# Altium PCB FPGA_DB.PcbDoc (part 1 of 5)
Units mil, origin at the board's own origin, x right, y up, seen from the top; angles counter-clockwise.
Board outline 5980 x 6510 mil, 4 copper layers (Top, Ground Plane, Power Plane, Bottom), stack 61.497 mil thick; 140 components, 246 nets, 1021 pads, 2685 vias.
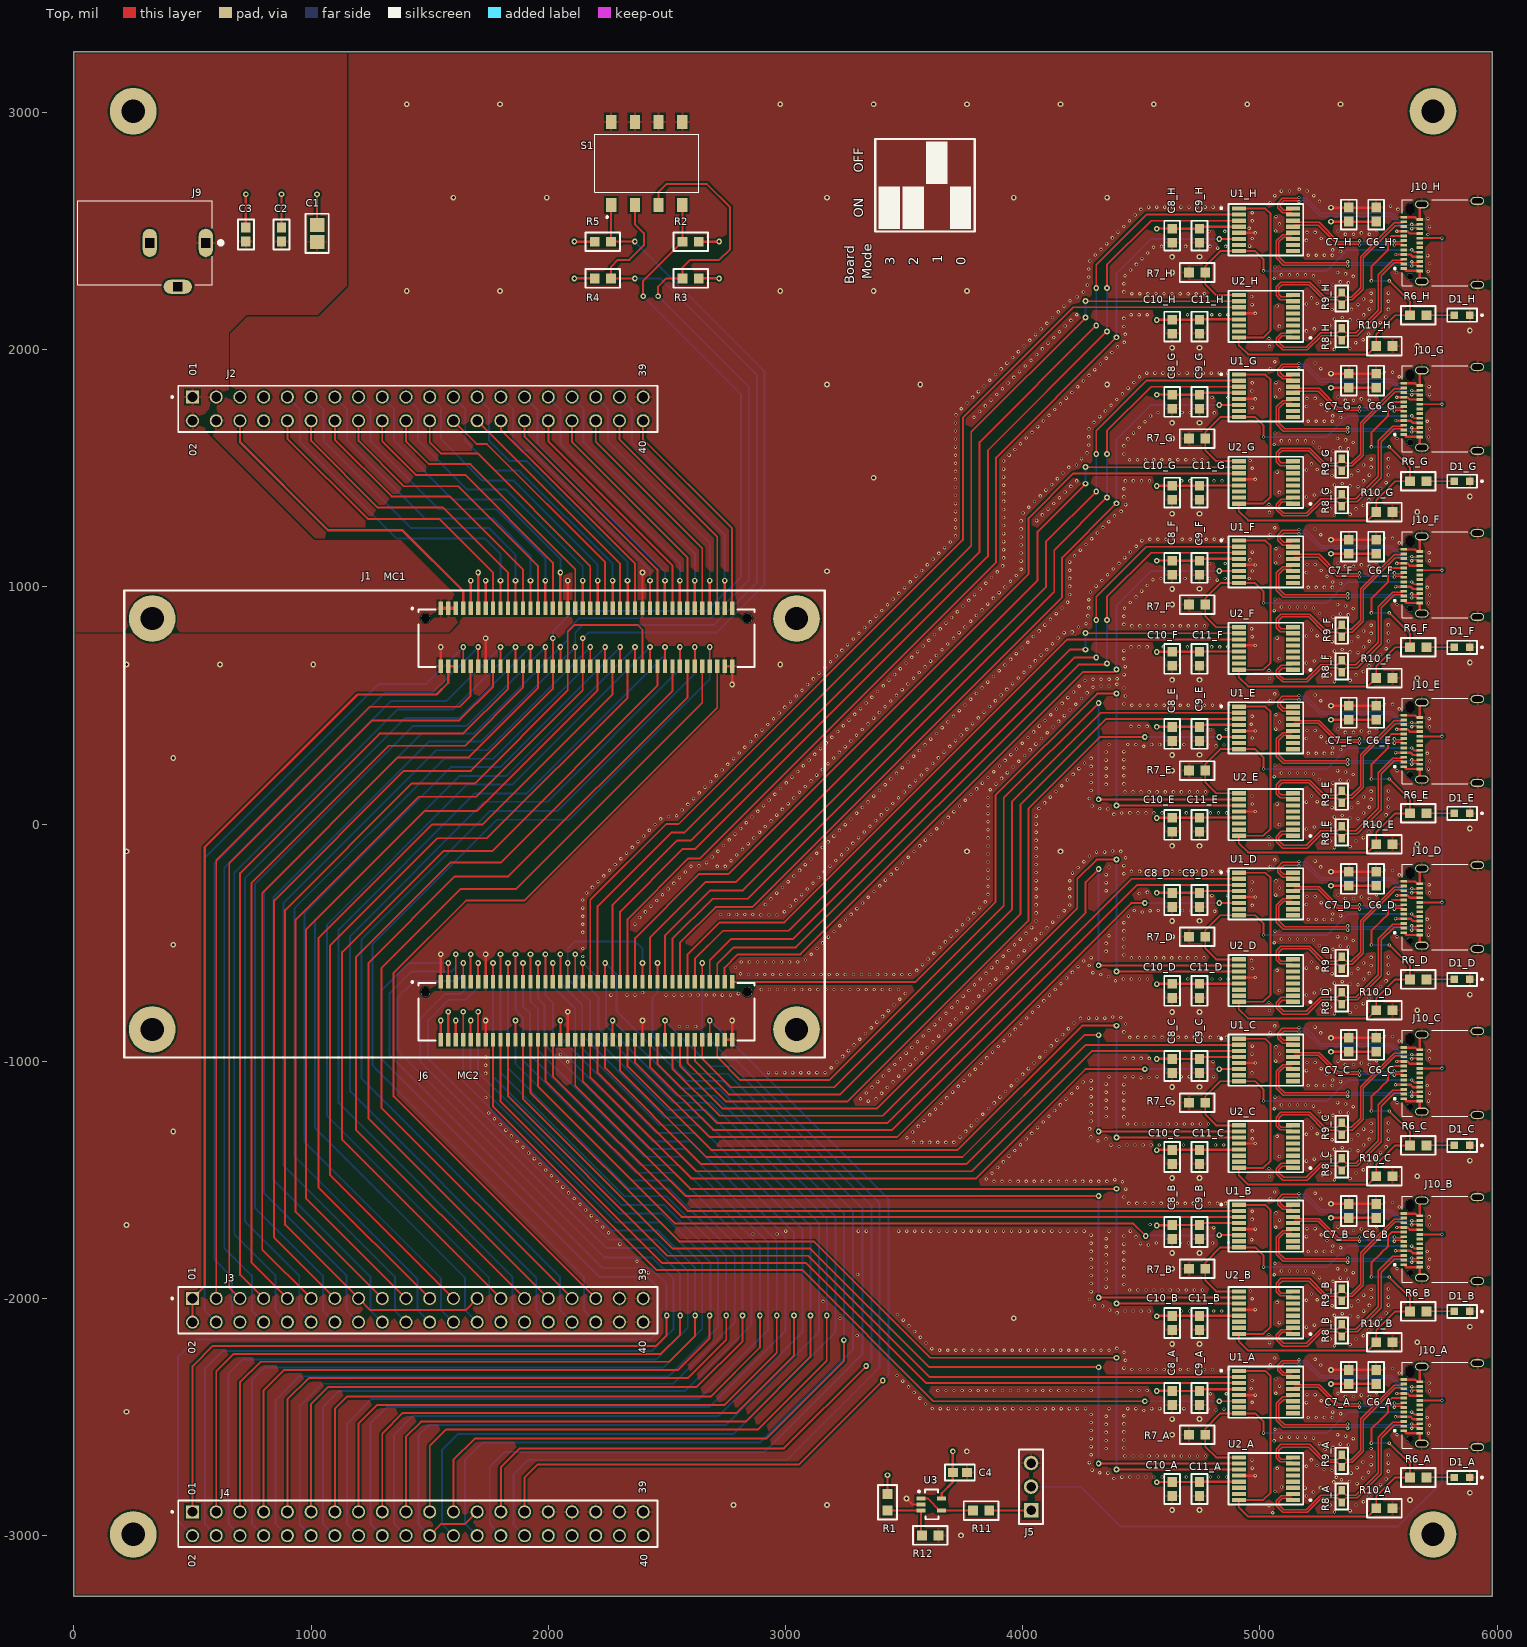
[diagram p0: Top view]
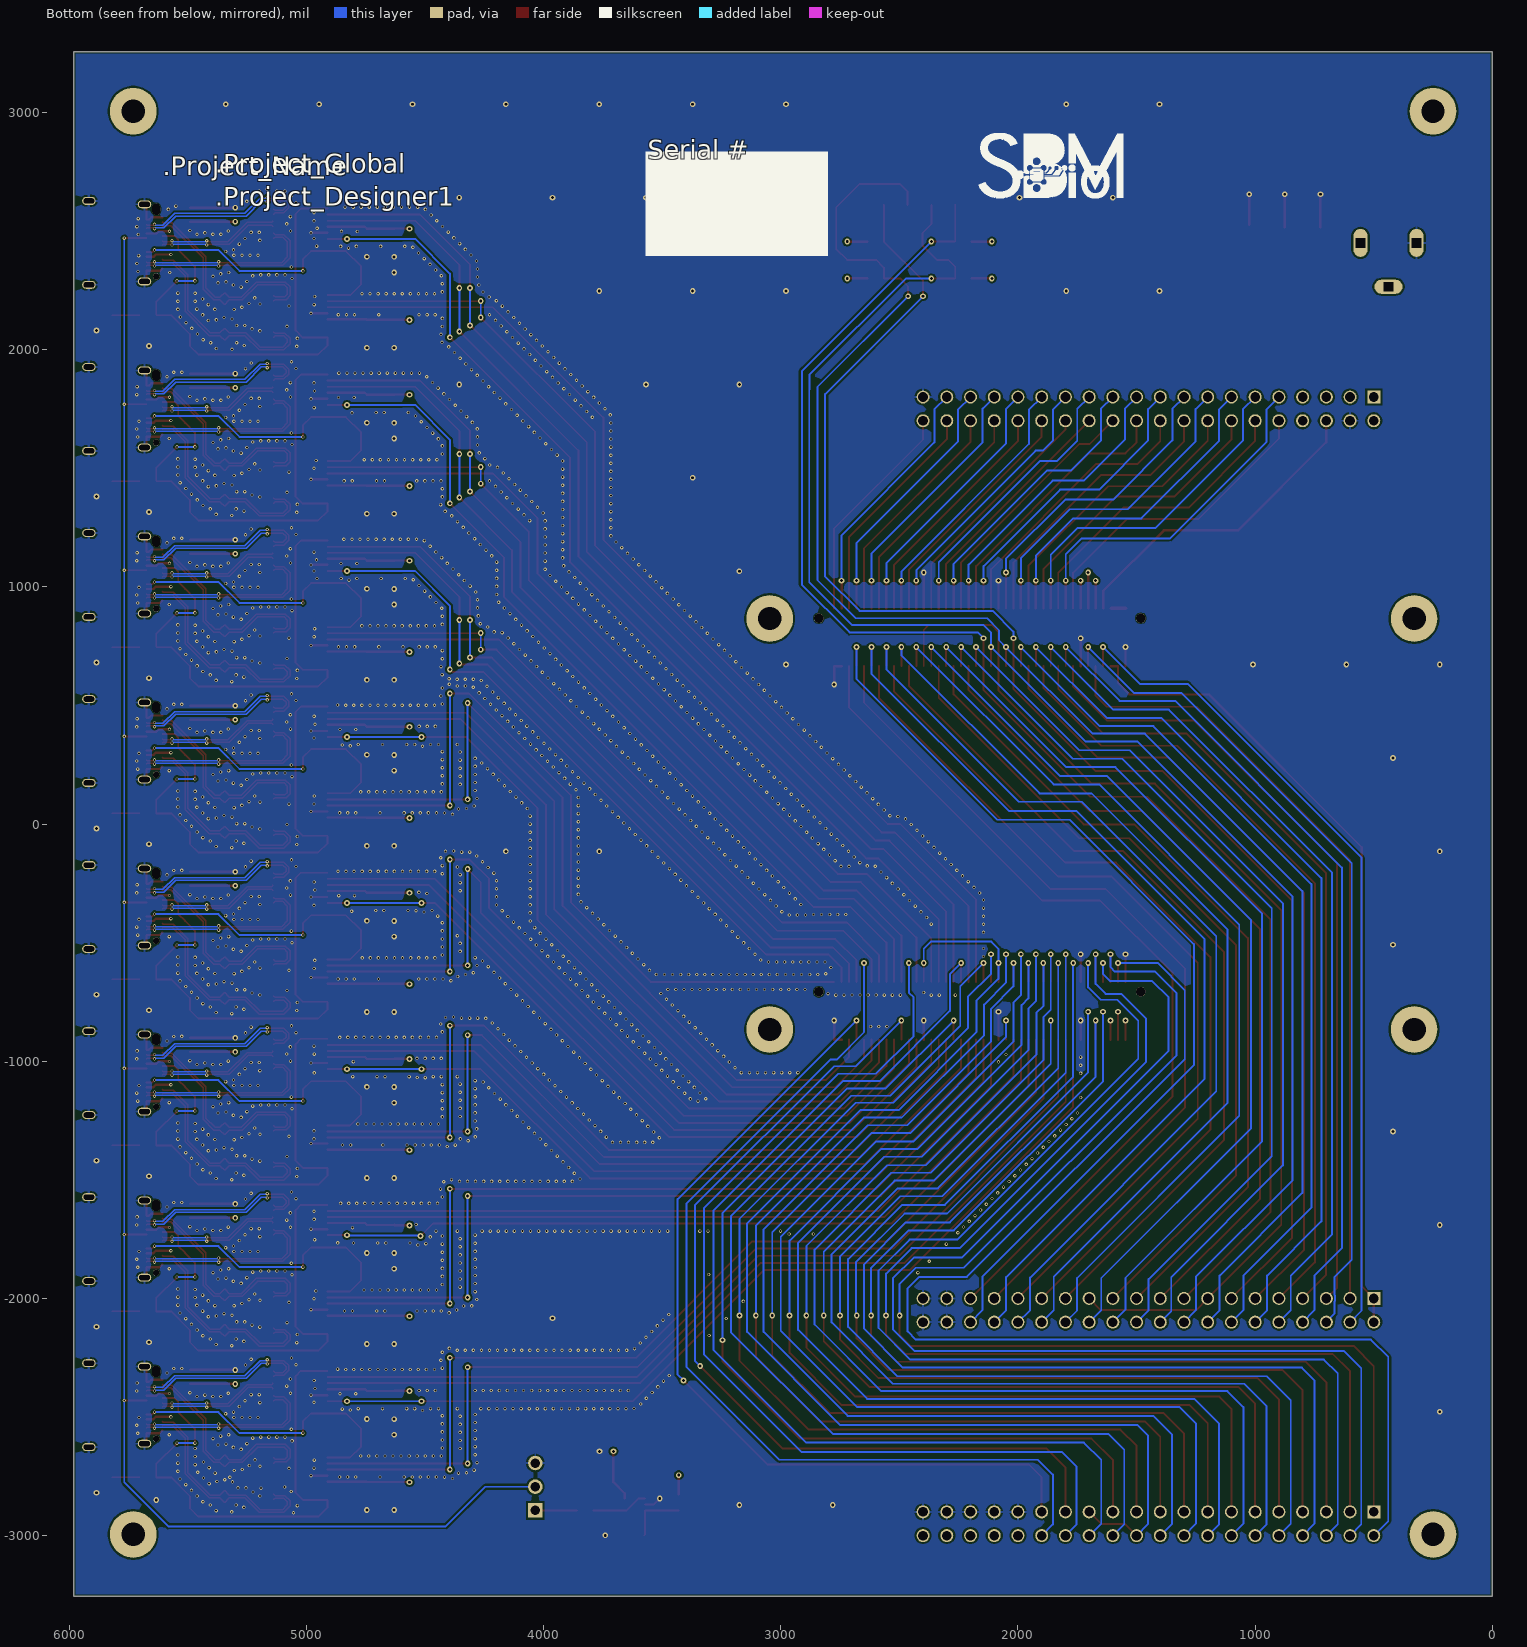
[diagram p1: Bottom view, seen from below]
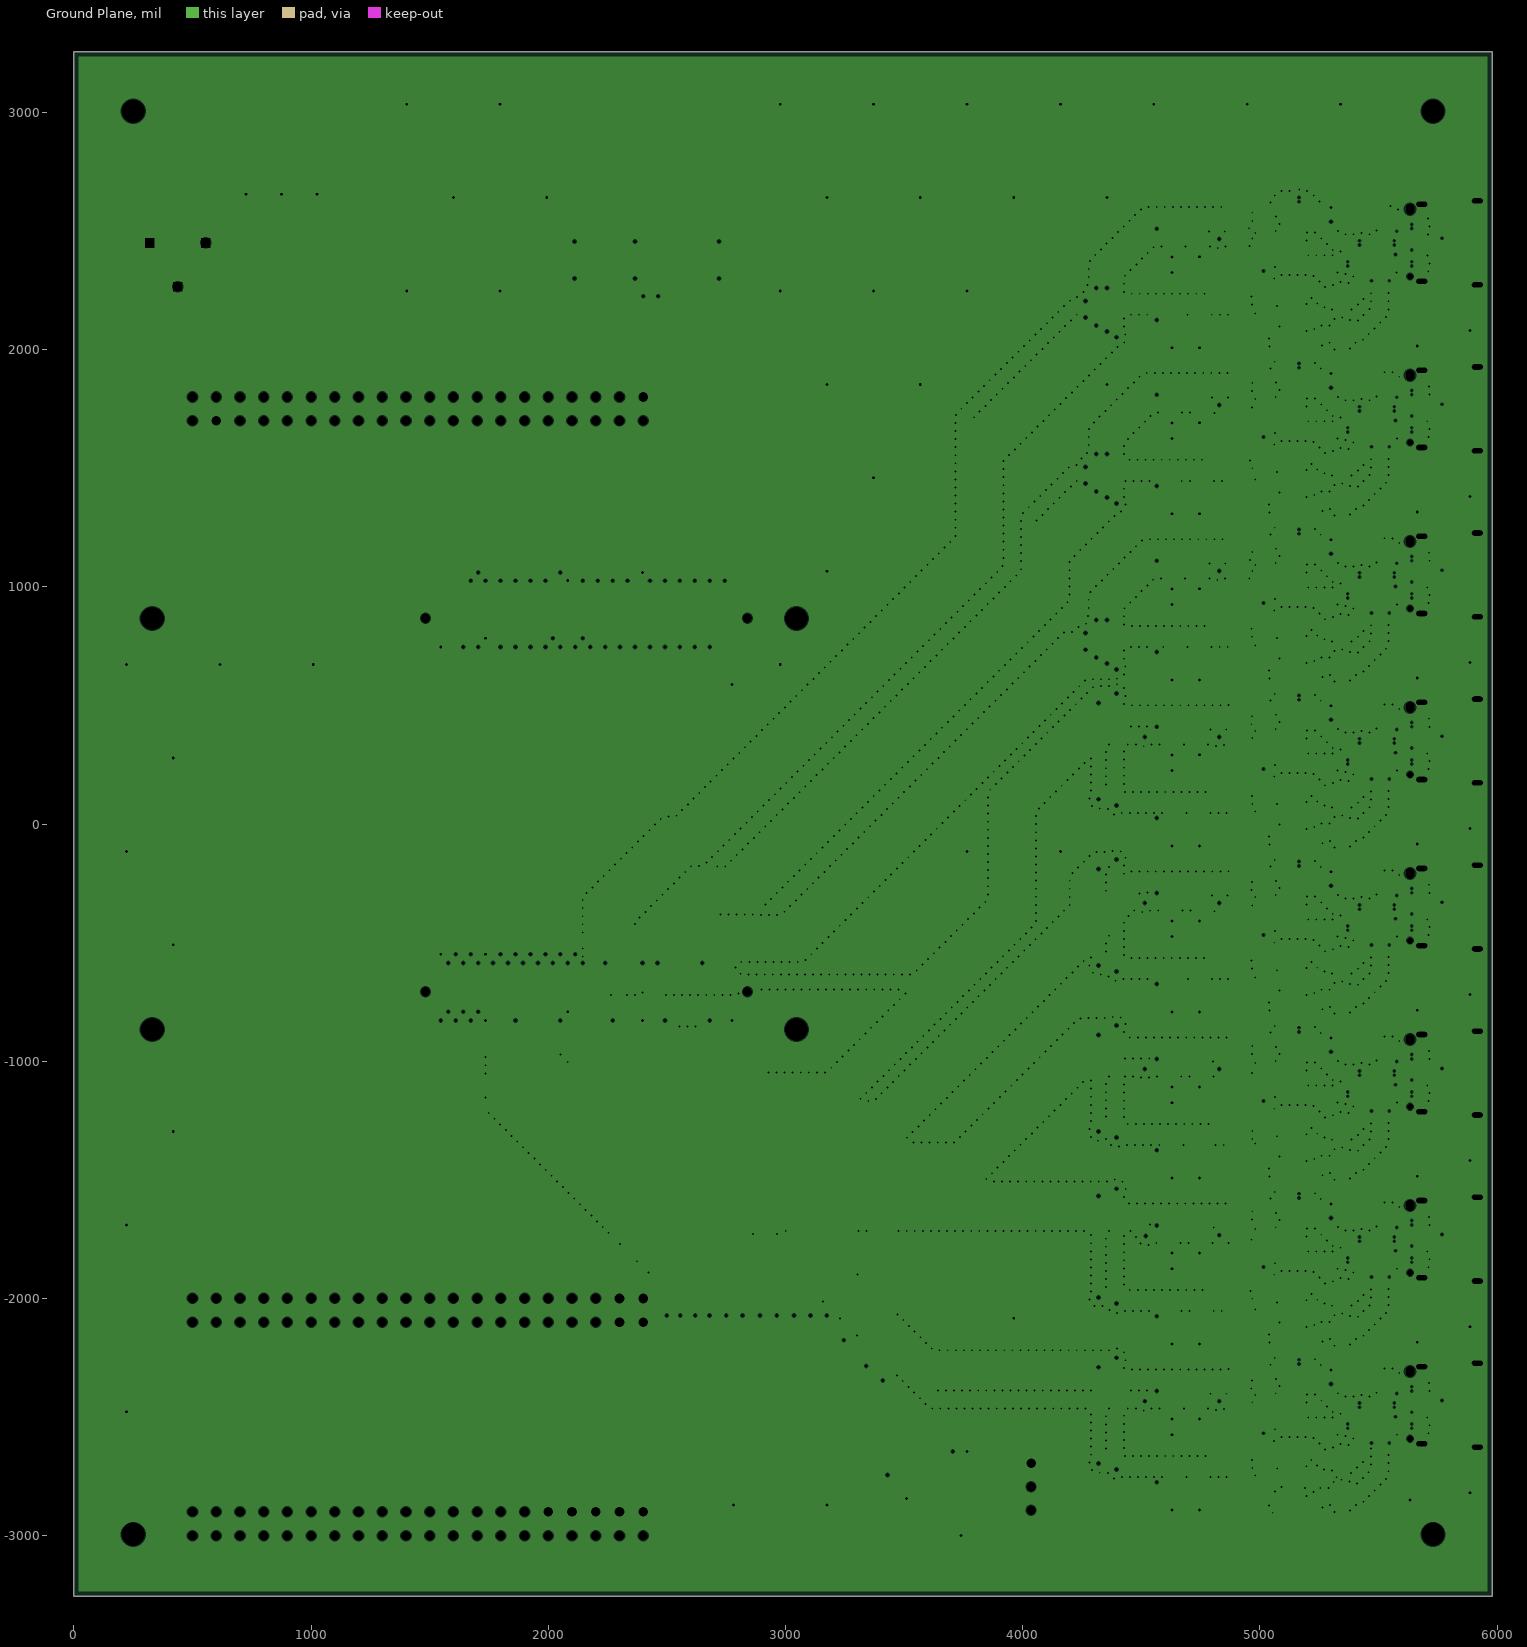
[diagram p2: Ground Plane, clearances drawn from the general rule]
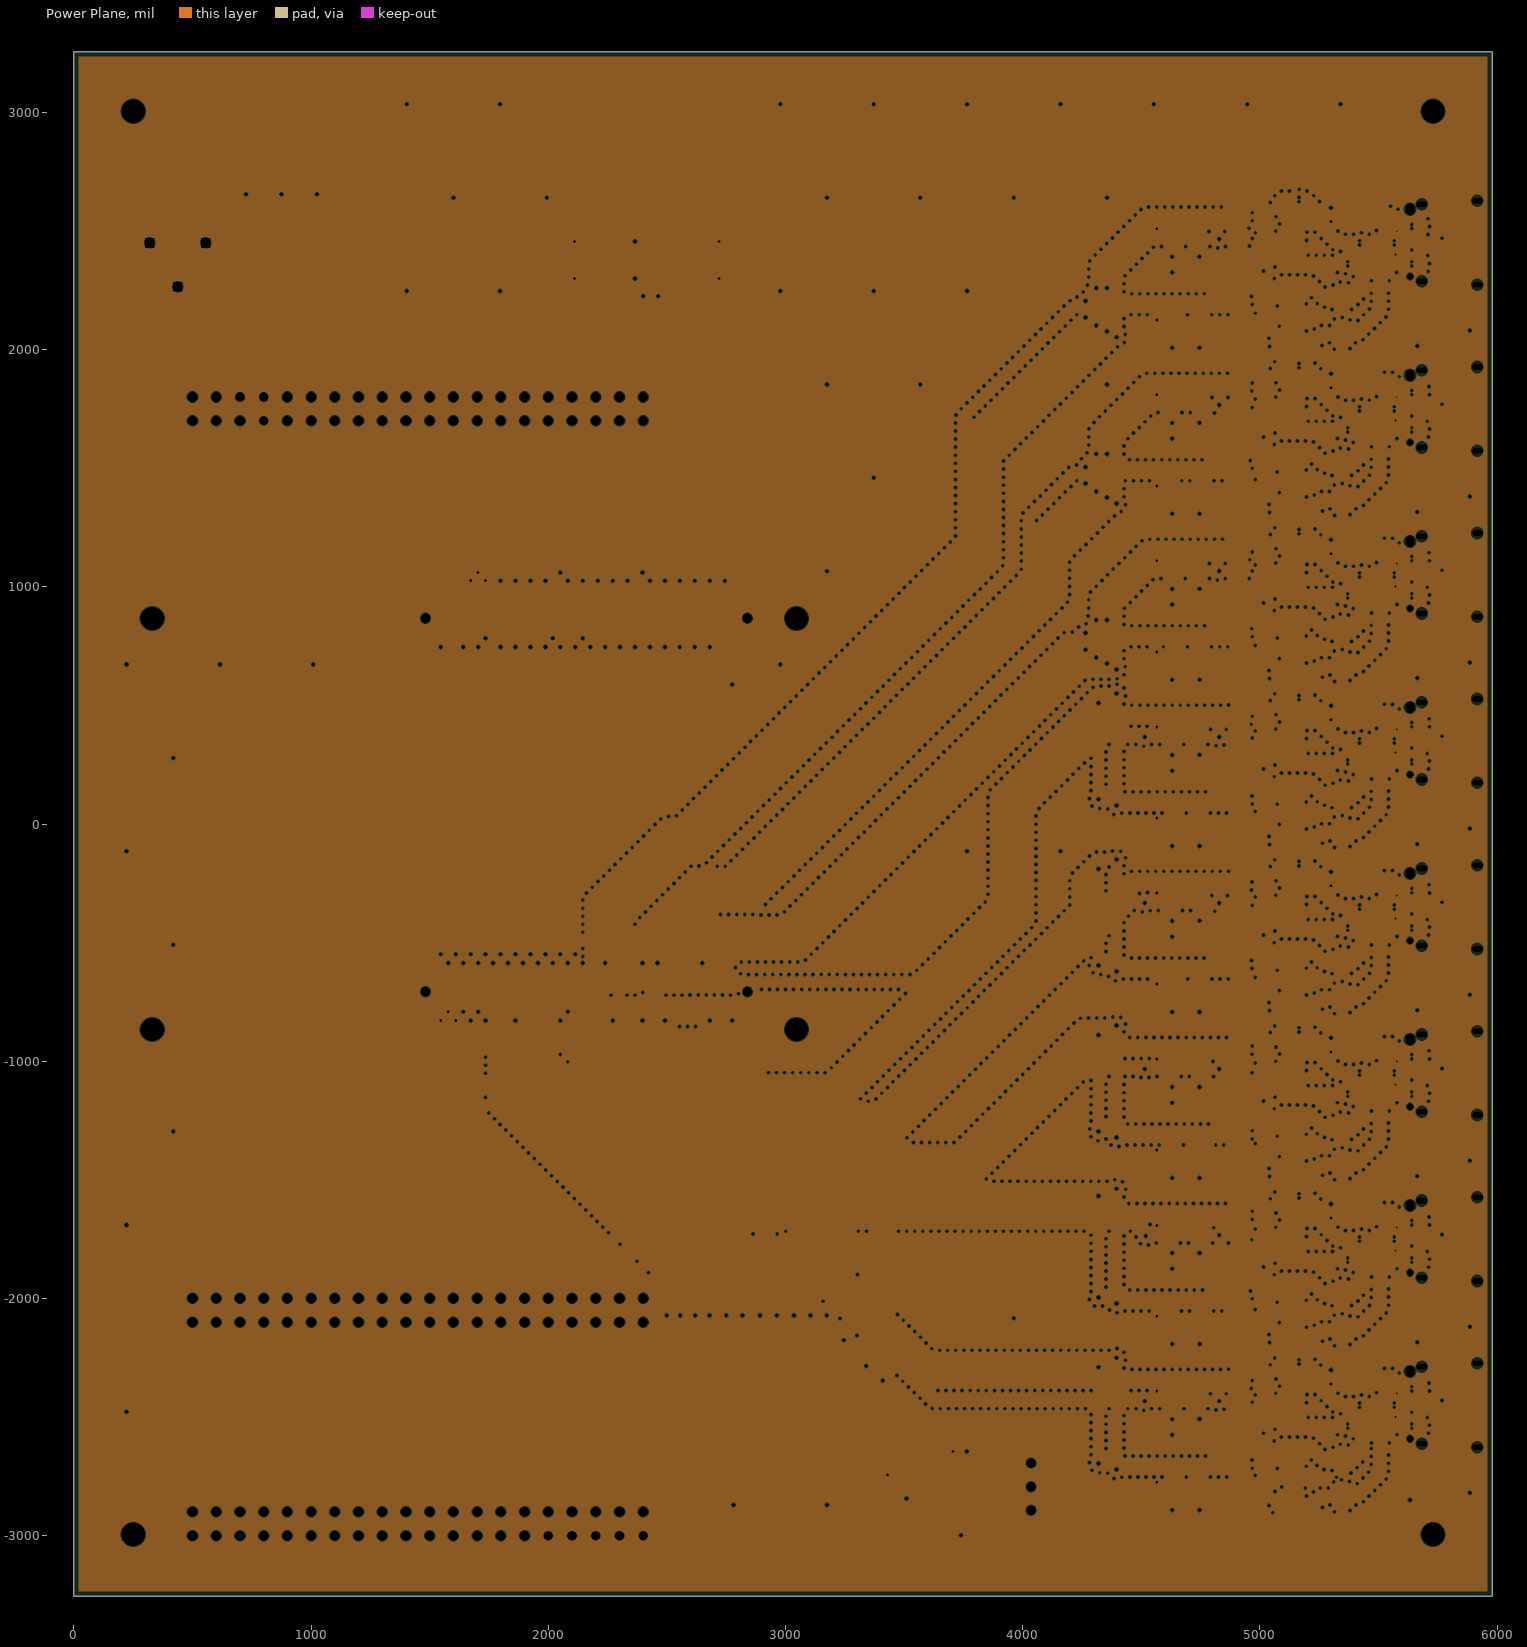
[diagram p3: Power Plane, clearances drawn from the general rule]

## Layer stack, top to bottom
Top Solder: solder mask 0.4, Solder Resist, Dk 3.5
Top: signal copper 1.378
Dielectric 1: prepreg 7.717, FR-4, Dk 4.74
Ground Plane: plane copper 1.378, net GND
Dielectric 3: core 40.551, Dk 4.6
Power Plane: plane copper 1.378, net 3V3
Dielectric 4: prepreg 7.717, Dk 4.74
Bottom: signal copper 1.378
Bottom Solder: solder mask 0.4, Solder Resist, Dk 3.5

## Board outline
0,-3255 0,3255 5980,3255 5980,-3255

## Design rules (kind name [scope] priority, off if disabled: settings)
BoardOutlineClearance [All] p1: gap=7.87 ignorepadtopadclearanceinfootprint=FALSE
Clearance "Stitching GND" [IsStitchingVia and InNet('GND') vs (IsVia and (Not IsStitchingVia)) Or IsPad] p1: gap=8 ignorepadtopadclearanceinfootprint=FALSE
Clearance [All] p2: gap=4 ignorepadtopadclearanceinfootprint=TRUE except(8: Arc-Fill Arc-Poly Arc-Region Track-Fill Track-Poly Track-Region SMDPad-Fill SMDPad-Poly SMDPad-Region THPad-Fill THPad-Poly THPad-Region Via-Fill Via-Poly Via-Region Fill-Fill Fill-Poly Fill-Region Poly-Poly Poly-Region Region-Region)
ComponentClearance [All] p1: gap=10 collisioncheckmode=3 verticalgap=10 showdistances=TRUE
DiffPairsRouting [InDifferentialPairClass('All Differential Pairs')] p1: maxlimit=5 minlimit=5 mostfreqgap=5 toplayer_minwidth=6.3 toplayer_maxwidth=6.3 toplayer_prefwidth=6.3 bottomlayer_minwidth=6.3 bottomlayer_maxwidth=6.3 bottomlayer_prefwidth=6.3 impedanceprofiledriven=TRUE impedanceprofileid={F0D65291-3C78-447D-A102-F418A0701119} impedanceprofilevalue=100.000000 maxuncoupledlength=30
Height [All] p1: minheight=0 maxheight=71497.94 prefheight=500
HoleSize [All] p1: absolutevalues=TRUE maxlimit=248.03 minlimit=7.87 maxpercent=80.000 minpercent=20.000
HoleToHoleClearance [All] p1: gap=10 allowstackedmicrovias=FALSE
Length [InDifferentialPairClass('LVDS_SPI')] p1: maxlimit=100000 minlimit=10
MinimumAnnularRing [All] p1: minimumring=3
MinimumSolderMaskSliver [All] p1: minsoldermaskwidth=3.94
PlaneClearance [All] p1: clearance=4
PlaneConnect PlaneConnectPowerPads [InPadClass('PowerPads')] p1: planeconnectstyle=Direct reliefexpansion=20 reliefentries=4 reliefconductorwidth=10 reliefairgap=10
PlaneConnect [All] p2: pad.planeconnectstyle=Relief pad.reliefexpansion=11.81 pad.reliefentries=4 pad.reliefconductorwidth=4 pad.reliefairgap=4 via.planeconnectstyle=Direct via.reliefexpansion=11.81 via.reliefentries=4 via.reliefconductorwidth=5 via.reliefairgap=5
PolygonConnect PolygonConnectPowerPads [All vs (InPadClass('PowerPads'))] p1: connectstyle=Direct reliefconductorwidth=10 reliefentries=4 polygonreliefangle="90 Angle" airgapwidth=10
PolygonConnect [All] p2: thpad.connectstyle=Relief thpad.reliefconductorwidth=10 thpad.reliefentries=4 thpad.polygonreliefangle="90 Angle" thpad.airgapwidth=8 smdpad.connectstyle=Relief smdpad.reliefconductorwidth=10 smdpad.reliefentries=4 smdpad.polygonreliefangle="90 Angle" smdpad.airgapwidth=8 via.connectstyle=Direct via.reliefconductorwidth=5 via.reliefentries=4 via.polygonreliefangle="90 Angle" via.airgapwidth=5
RoutingVias Diff_Vias [InDifferentialPairClass('All Differential Pairs')] p1: holewidth=8 width=14 viastyle="Through Hole" minholewidth=8 minwidth=14 maxholewidth=8 maxwidth=14
RoutingVias [All] p2: holewidth=12 width=24 viastyle="Through Hole" minholewidth=8 minwidth=14 maxholewidth=16 maxwidth=32
SilkToSilkClearance [All] p1: silktosilkclearance=5
SilkToSolderMaskClearance [IsPad] p1: minsilkscreentomaskgap=5 clearancetoexposedcopper=TRUE
SolderMaskExpansion SolderMaskExpansion_Via [IsVia] p1: expansion=2 istentingtop=TRUE
SolderMaskExpansion SolderMaskExpansion_MH [InPadClass('MH')] p2: expansion=4 istentingtop=FALSE
SolderMaskExpansion [All] p3: expansion=2 istentingtop=FALSE
SupplyNets "Schematic Supply Nets_7" [InNet('1V0')] p1: voltage=0.000
SupplyNets "Schematic Supply Nets_6" [InNet('5V0')] p2: voltage=0.000
SupplyNets "Schematic Supply Nets_5" [InNet('VCCO_MC2')] p3: voltage=0.000
SupplyNets "Schematic Supply Nets_4" [InNet('VCCO_MC1')] p4: voltage=0.000
SupplyNets "Schematic Supply Nets_3" [InNet('1V8')] p5: voltage=0.000
SupplyNets "Schematic Supply Nets_2" [InNet('3V3')] p6: voltage=0.000
SupplyNets "Schematic Supply Nets_1" [InNet('GND')] p7: voltage=0.000
UnRoutedNet [All] p1: checkbadconnections=TRUE
Width 5V0_Width [InNet('5V0')] p1: maxlimit=100 minlimit=10 preferedwidth=20 minimp=50.000000 maximp=50.000000 favimp=50.000000
Width 3V3_Width [InNet('3V3')] p2: maxlimit=100 minlimit=10 preferedwidth=20
Width GND_Width [InNet('GND')] p3: maxlimit=100 minlimit=10 preferedwidth=20 minimp=50.000000 maximp=50.000000 favimp=50.000000
Width General [All] p4: maxlimit=20 minlimit=5 preferedwidth=8 minimp=50.000000 maximp=50.000000 favimp=50.000000
19 further rules are at their usual default settings.

## Classes and differential pairs
pad class MH: Free-MH
net class SPI: C\S\_A C\S\_A_N C\S\_A_P C\S\_B C\S\_B_N C\S\_B_P C\S\_C C\S\_C_N C\S\_C_P C\S\_D C\S\_D_N C\S\_D_P C\S\_E C\S\_E_N C\S\_E_P C\S\_F C\S\_F_N C\S\_F_P C\S\_G C\S\_G_N C\S\_G_P C\S\_H C\S\_H_N C\S\_H_P MISO1_A_N MISO1_A_P MISO1_B_N MISO1_B_P MISO1_C_N MISO1_C_P MISO1_D_N MISO1_D_P MISO1_E_N MISO1_E_P MISO1_F_N MISO1_F_P MISO1_G_N MISO1_G_P MISO1_H_N MISO1_H_P MISO2_A_N MISO2_A_P MISO2_B_N MISO2_B_P MISO2_C_N MISO2_C_P MISO2_D_N MISO2_D_P MISO2_E_N MISO2_E_P MISO2_F_N MISO2_F_P MISO2_G_N MISO2_G_P MISO2_H_N MISO2_H_P MISO_A1 MISO_A2 MISO_B1 MISO_B2 MISO_C1 MISO_C2 MISO_D1 MISO_D2 MISO_E1 MISO_E2 MISO_F1 MISO_F2 MISO_G1 MISO_G2 MISO_H1 MISO_H2 MOSI_A MOSI_A_N MOSI_A_P MOSI_B MOSI_B_N MOSI_B_P MOSI_C MOSI_C_N MOSI_C_P MOSI_D MOSI_D_N MOSI_D_P MOSI_E MOSI_E_N MOSI_E_P MOSI_F MOSI_F_N MOSI_F_P MOSI_G MOSI_G_N MOSI_G_P MOSI_H MOSI_H_N MOSI_H_P SCLK_A SCLK_A_N SCLK_A_P SCLK_B SCLK_B_N SCLK_B_P SCLK_C SCLK_C_N SCLK_C_P SCLK_D SCLK_D_N SCLK_D_P SCLK_E SCLK_E_N SCLK_E_P SCLK_F SCLK_F_N SCLK_F_P SCLK_G SCLK_G_N SCLK_G_P SCLK_H SCLK_H_N SCLK_H_P
channel class INTAN_Interface: A B C D E F G H
component class U_Onboard_IO: C1 C2 C3 C4 J5 J9 R1 R2 R3 R4 R5 R11 R12 S1 U3
component class U_FPGA: J1 J2 J3 J4 J6
component class H: C6_H C7_H C8_H C9_H C10_H C11_H D1_H J10_H R6_H R7_H R8_H R9_H R10_H U1_H U2_H
component class G: C6_G C7_G C8_G C9_G C10_G C11_G D1_G J10_G R6_G R7_G R8_G R9_G R10_G U1_G U2_G
component class F: C6_F C7_F C8_F C9_F C10_F C11_F D1_F J10_F R6_F R7_F R8_F R9_F R10_F U1_F U2_F
component class E: C6_E C7_E C8_E C9_E C10_E C11_E D1_E J10_E R6_E R7_E R8_E R9_E R10_E U1_E U2_E
component class D: C6_D C7_D C8_D C9_D C10_D C11_D D1_D J10_D R6_D R7_D R8_D R9_D R10_D U1_D U2_D
component class C: C6_C C7_C C8_C C9_C C10_C C11_C D1_C J10_C R6_C R7_C R8_C R9_C R10_C U1_C U2_C
component class B: C6_B C7_B C8_B C9_B C10_B C11_B D1_B J10_B R6_B R7_B R8_B R9_B R10_B U1_B U2_B
component class A: C6_A C7_A C8_A C9_A C10_A C11_A D1_A J10_A R6_A R7_A R8_A R9_A R10_A U1_A U2_A
differential pair SCLK_H: +SCLK_H_P -SCLK_H_N
differential pair SCLK_G: +SCLK_G_P -SCLK_G_N
differential pair SCLK_F: +SCLK_F_P -SCLK_F_N
differential pair SCLK_E: +SCLK_E_P -SCLK_E_N
differential pair SCLK_D: +SCLK_D_P -SCLK_D_N
differential pair SCLK_C: +SCLK_C_P -SCLK_C_N
differential pair SCLK_B: +SCLK_B_P -SCLK_B_N
differential pair SCLK_A: +SCLK_A_P -SCLK_A_N
differential pair MOSI_H: +MOSI_H_P -MOSI_H_N
differential pair MOSI_G: +MOSI_G_P -MOSI_G_N
differential pair MOSI_F: +MOSI_F_P -MOSI_F_N
differential pair MOSI_E: +MOSI_E_P -MOSI_E_N
differential pair MOSI_D: +MOSI_D_P -MOSI_D_N
differential pair MOSI_C: +MOSI_C_P -MOSI_C_N
differential pair MOSI_B: +MOSI_B_P -MOSI_B_N
differential pair MOSI_A: +MOSI_A_P -MOSI_A_N
differential pair MISO2_H: +MISO2_H_P -MISO2_H_N
differential pair MISO2_G: +MISO2_G_P -MISO2_G_N
differential pair MISO2_F: +MISO2_F_P -MISO2_F_N
differential pair MISO2_E: +MISO2_E_P -MISO2_E_N
differential pair MISO2_D: +MISO2_D_P -MISO2_D_N
differential pair MISO2_C: +MISO2_C_P -MISO2_C_N
differential pair MISO2_B: +MISO2_B_P -MISO2_B_N
differential pair MISO2_A: +MISO2_A_P -MISO2_A_N
differential pair MISO1_H: +MISO1_H_P -MISO1_H_N
differential pair MISO1_G: +MISO1_G_P -MISO1_G_N
differential pair MISO1_F: +MISO1_F_P -MISO1_F_N
differential pair MISO1_E: +MISO1_E_P -MISO1_E_N
differential pair MISO1_D: +MISO1_D_P -MISO1_D_N
differential pair MISO1_C: +MISO1_C_P -MISO1_C_N
differential pair MISO1_B: +MISO1_B_P -MISO1_B_N
differential pair MISO1_A: +MISO1_A_P -MISO1_A_N
differential pair C\S\_H: +C\S\_H_P -C\S\_H_N
differential pair C\S\_G: +C\S\_G_P -C\S\_G_N
differential pair C\S\_F: +C\S\_F_P -C\S\_F_N
differential pair C\S\_E: +C\S\_E_P -C\S\_E_N
differential pair C\S\_D: +C\S\_D_P -C\S\_D_N
differential pair C\S\_C: +C\S\_C_P -C\S\_C_N
differential pair C\S\_B: +C\S\_B_P -C\S\_B_N
differential pair C\S\_A: +C\S\_A_P -C\S\_A_N

## Components (designator, comment, footprint, x,y, rotation, side; value= is the part's Value field where it differs from the comment)
C1 "Value" 0805_CAPACITOR 1025,2490 r270 top
C2 "Value" 0603_CAPACITOR 875,2485 r270 top
C3 "Value" 0603_CAPACITOR 725,2485 r270 top
C4 "Value" 0603_CAPACITOR 3735,-2733.98 r180 top
C6_A "Value" 0603_CAPACITOR 5490,-2331.02 r270 top (schematic designator C6)
C6_B "Value" 0603_CAPACITOR 5490,-1631.02 r270 top (schematic designator C6)
C6_C "Value" 0603_CAPACITOR 5490,-931.02 r270 top (schematic designator C6)
C6_D "Value" 0603_CAPACITOR 5490,-231.02 r270 top (schematic designator C6)
C6_E "Value" 0603_CAPACITOR 5490,468.98 r270 top (schematic designator C6)
C6_F "Value" 0603_CAPACITOR 5490,1168.98 r270 top (schematic designator C6)
C6_G "Value" 0603_CAPACITOR 5490,1868.98 r270 top (schematic designator C6)
C6_H "Value" 0603_CAPACITOR 5490,2568.98 r270 top (schematic designator C6)
C7_A "Value" 0603_CAPACITOR 5375,-2331.02 r270 top (schematic designator C7)
C7_B "Value" 0603_CAPACITOR 5375,-1631.02 r270 top (schematic designator C7)
C7_C "Value" 0603_CAPACITOR 5375,-931.02 r270 top (schematic designator C7)
C7_D "Value" 0603_CAPACITOR 5375,-231.02 r270 top (schematic designator C7)
C7_E "Value" 0603_CAPACITOR 5375,468.98 r270 top (schematic designator C7)
C7_F "Value" 0603_CAPACITOR 5375,1168.98 r270 top (schematic designator C7)
C7_G "Value" 0603_CAPACITOR 5375,1868.98 r270 top (schematic designator C7)
C7_H "Value" 0603_CAPACITOR 5375,2568.98 r270 top (schematic designator C7)
C8_A "Value" 0603_CAPACITOR 4630,-2420 r270 top (schematic designator C8)
C8_B "Value" 0603_CAPACITOR 4630,-1720 r270 top (schematic designator C8)
C8_C "Value" 0603_CAPACITOR 4630,-1020 r270 top (schematic designator C8)
C8_D "Value" 0603_CAPACITOR 4630,-320 r270 top (schematic designator C8)
C8_E "Value" 0603_CAPACITOR 4630,380 r270 top (schematic designator C8)
C8_F "Value" 0603_CAPACITOR 4630,1080 r270 top (schematic designator C8)
C8_G "Value" 0603_CAPACITOR 4630,1780 r270 top (schematic designator C8)
C8_H "Value" 0603_CAPACITOR 4630,2480 r270 top (schematic designator C8)
C9_A "Value" 0603_CAPACITOR 4745,-2420 r270 top (schematic designator C9)
C9_B "Value" 0603_CAPACITOR 4745,-1720 r270 top (schematic designator C9)
C9_C "Value" 0603_CAPACITOR 4745,-1020 r270 top (schematic designator C9)
C9_D "Value" 0603_CAPACITOR 4745,-320 r270 top (schematic designator C9)
C9_E "Value" 0603_CAPACITOR 4745,380 r270 top (schematic designator C9)
C9_F "Value" 0603_CAPACITOR 4745,1080 r270 top (schematic designator C9)
C9_G "Value" 0603_CAPACITOR 4745,1780 r270 top (schematic designator C9)
C9_H "Value" 0603_CAPACITOR 4745,2480 r270 top (schematic designator C9)
C10_A "Value" 0603_CAPACITOR 4630,-2803.39 r270 top (schematic designator C10)
C10_B "Value" 0603_CAPACITOR 4630,-2103.39 r270 top (schematic designator C10)
C10_C "Value" 0603_CAPACITOR 4630,-1403.39 r270 top (schematic designator C10)
C10_D "Value" 0603_CAPACITOR 4630,-703.39 r270 top (schematic designator C10)
C10_E "Value" 0603_CAPACITOR 4630,-3.39 r270 top (schematic designator C10)
C10_F "Value" 0603_CAPACITOR 4630,696.61 r270 top (schematic designator C10)
C10_G "Value" 0603_CAPACITOR 4630,1396.61 r270 top (schematic designator C10)
C10_H "Value" 0603_CAPACITOR 4630,2096.61 r270 top (schematic designator C10)
C11_A "Value" 0603_CAPACITOR 4745,-2803.39 r270 top (schematic designator C11)
C11_B "Value" 0603_CAPACITOR 4745,-2103.39 r270 top (schematic designator C11)
C11_C "Value" 0603_CAPACITOR 4745,-1403.39 r270 top (schematic designator C11)
C11_D "Value" 0603_CAPACITOR 4745,-703.39 r270 top (schematic designator C11)
C11_E "Value" 0603_CAPACITOR 4745,-3.39 r270 top (schematic designator C11)
C11_F "Value" 0603_CAPACITOR 4745,696.61 r270 top (schematic designator C11)
C11_G "Value" 0603_CAPACITOR 4745,1396.61 r270 top (schematic designator C11)
C11_H "Value" 0603_CAPACITOR 4745,2096.61 r270 top (schematic designator C11)
D1_A "GREEN" LED_APT1608LZGCK 5852.52,-2755 r0 top (schematic designator D1)
D1_B "GREEN" LED_APT1608LZGCK 5852.52,-2055 r0 top (schematic designator D1)
D1_C "GREEN" LED_APT1608LZGCK 5852.52,-1355 r0 top (schematic designator D1)
D1_D "GREEN" LED_APT1608LZGCK 5852.52,-655 r0 top (schematic designator D1)
D1_E "GREEN" LED_APT1608LZGCK 5852.52,45 r0 top (schematic designator D1)
D1_F "GREEN" LED_APT1608LZGCK 5852.52,745 r0 top (schematic designator D1)
D1_G "GREEN" LED_APT1608LZGCK 5852.52,1445 r0 top (schematic designator D1)
D1_H "GREEN" LED_APT1608LZGCK 5852.52,2145 r0 top (schematic designator D1)
J1 "BTE-040-01-F-D-A" SAMTEC_BTE-040-01-F-D-A 2160.91,787.32 r0 top locked
J2 "SSW-120-01-F-D" SAMTEC_SSW-120-01-F-D 500,1800 r180 top
J3 "SSW-120-01-F-D" SAMTEC_SSW-120-01-F-D 500,-2000 r180 top locked
J4 "SSW-120-01-F-D" SAMTEC_SSW-120-01-F-D 500,-2900 r180 top
J5 "TSW-103-07-F-S" SMTC-TSW-103-07-X-S 4035,-2893.98 r90 top
J6 "BTE-040-01-F-D-A" SAMTEC_BTE-040-01-F-D-A 2160.91,-787.48 r0 top locked
J9 "PJ-102AH" CUI_PJ-102AH 300,2450 r180 top
J10_A "217183-0001" CON_USB_C_SMD 5805,-2450 r90 top locked (schematic designator J10)
J10_B "217183-0001" CON_USB_C_SMD 5805,-1750 r90 top locked (schematic designator J10)
J10_C "217183-0001" CON_USB_C_SMD 5805,-1050 r90 top locked (schematic designator J10)
J10_D "217183-0001" CON_USB_C_SMD 5805,-350 r90 top locked (schematic designator J10)
J10_E "217183-0001" CON_USB_C_SMD 5805,350 r90 top locked (schematic designator J10)
J10_F "217183-0001" CON_USB_C_SMD 5805,1050 r90 top locked (schematic designator J10)
J10_G "217183-0001" CON_USB_C_SMD 5805,1750 r90 top locked (schematic designator J10)
J10_H "217183-0001" CON_USB_C_SMD 5805,2450 r90 top locked (schematic designator J10)
R1 "Value" 0603_RESISTOR 3430,-2859.53 r270 top
R2 "Value" 0603_RESISTOR 2600,2455 r0 top
R3 "Value" 0603_RESISTOR 2600,2300 r0 top
R4 "Value" 0603_RESISTOR 2230,2300 r180 top
R5 "Value" 0603_RESISTOR 2230,2455 r180 top
R6_A "Value" 0603_RESISTOR 5667.52,-2755 r180 top (schematic designator R6)
R6_B "Value" 0603_RESISTOR 5667.52,-2055 r180 top (schematic designator R6)
R6_C "Value" 0603_RESISTOR 5667.52,-1355 r180 top (schematic designator R6)
R6_D "Value" 0603_RESISTOR 5667.52,-655 r180 top (schematic designator R6)
R6_E "Value" 0603_RESISTOR 5667.52,45 r180 top (schematic designator R6)
R6_F "Value" 0603_RESISTOR 5667.52,745 r180 top (schematic designator R6)
R6_G "Value" 0603_RESISTOR 5667.52,1445 r180 top (schematic designator R6)
R6_H "Value" 0603_RESISTOR 5667.52,2145 r180 top (schematic designator R6)
R7_A "Value" 0603_RESISTOR 4735,-2575 r0 top (schematic designator R7)
R7_B "Value" 0603_RESISTOR 4735,-1875 r0 top (schematic designator R7)
R7_C "Value" 0603_RESISTOR 4735,-1175 r0 top (schematic designator R7)
R7_D "Value" 0603_RESISTOR 4735,-475 r0 top (schematic designator R7)
R7_E "Value" 0603_RESISTOR 4735,225 r0 top (schematic designator R7)
R7_F "Value" 0603_RESISTOR 4735,925 r0 top (schematic designator R7)
R7_G "Value" 0603_RESISTOR 4735,1625 r0 top (schematic designator R7)
R7_H "Value" 0603_RESISTOR 4735,2325 r0 top (schematic designator R7)
R8_A "Value" 0402_Resistor 5345,-2835 r270 top (schematic designator R8)
R8_B "Value" 0402_Resistor 5345,-2135 r270 top (schematic designator R8)
R8_C "Value" 0402_Resistor 5345,-1435 r270 top (schematic designator R8)
R8_D "Value" 0402_Resistor 5345,-735 r270 top (schematic designator R8)
R8_E "Value" 0402_Resistor 5345,-35 r270 top (schematic designator R8)
R8_F "Value" 0402_Resistor 5345,665 r270 top (schematic designator R8)
R8_G "Value" 0402_Resistor 5345,1365 r270 top (schematic designator R8)
R8_H "Value" 0402_Resistor 5345,2065 r270 top (schematic designator R8)
R9_A "Value" 0402_Resistor 5345,-2685 r90 top (schematic designator R9)
R9_B "Value" 0402_Resistor 5345,-1985 r90 top (schematic designator R9)
R9_C "Value" 0402_Resistor 5345,-1285 r90 top (schematic designator R9)
R9_D "Value" 0402_Resistor 5345,-585 r90 top (schematic designator R9)
R9_E "Value" 0402_Resistor 5345,115 r90 top (schematic designator R9)
R9_F "Value" 0402_Resistor 5345,815 r90 top (schematic designator R9)
R9_G "Value" 0402_Resistor 5345,1515 r90 top (schematic designator R9)
R9_H "Value" 0402_Resistor 5345,2215 r90 top (schematic designator R9)
R10_A "Value" 0603_RESISTOR 5525,-2885 r180 top (schematic designator R10)
R10_B "Value" 0603_RESISTOR 5525,-2185 r180 top (schematic designator R10)
R10_C "Value" 0603_RESISTOR 5525,-1485 r180 top (schematic designator R10)
R10_D "Value" 0603_RESISTOR 5525,-785 r180 top (schematic designator R10)
R10_E "Value" 0603_RESISTOR 5525,-85 r180 top (schematic designator R10)
R10_F "Value" 0603_RESISTOR 5525,615 r180 top (schematic designator R10)
R10_G "Value" 0603_RESISTOR 5525,1315 r180 top (schematic designator R10)
R10_H "Value" 0603_RESISTOR 5525,2015 r180 top (schematic designator R10)
R11 "Value" 0603_RESISTOR 3824.45,-2894.57 r0 top
R12 "Value" 0603_RESISTOR 3610,-2998.98 r0 top
S1 "DS04-254-2-04BK-SMT-TR" SW_DS04-254-2-04BK-SMT-TR 2415,2785 r90 top
U1_A "DS90LV047A" TTSOP_16 5025,-2395 r0 top (schematic designator U1)
U1_B "DS90LV047A" TTSOP_16 5025,-1695 r0 top locked (schematic designator U1)
U1_C "DS90LV047A" TTSOP_16 5025,-995 r0 top (schematic designator U1)
U1_D "DS90LV047A" TTSOP_16 5025,-295 r0 top (schematic designator U1)
U1_E "DS90LV047A" TTSOP_16 5025,405 r0 top (schematic designator U1)
U1_F "DS90LV047A" TTSOP_16 5025,1105 r0 top (schematic designator U1)
U1_G "DS90LV047A" TTSOP_16 5025,1805 r0 top (schematic designator U1)
U1_H "DS90LV047A" TTSOP_16 5025,2505 r0 top (schematic designator U1)
U2_A "DS90LV048A" TTSOP_16 5025,-2760 r180 top (schematic designator U2)
U2_B "DS90LV048A" TTSOP_16 5025,-2060 r180 top (schematic designator U2)
U2_C "DS90LV048A" TTSOP_16 5025,-1360 r180 top (schematic designator U2)
U2_D "DS90LV048A" TTSOP_16 5025,-660 r180 top (schematic designator U2)
U2_E "DS90LV048A" TTSOP_16 5025,40 r180 top (schematic designator U2)
U2_F "DS90LV048A" TTSOP_16 5025,740 r180 top (schematic designator U2)
U2_G "DS90LV048A" TTSOP_16 5025,1440 r180 top (schematic designator U2)
U2_H "DS90LV048A" TTSOP_16 5025,2140 r180 top (schematic designator U2)
U3 "TLV9001" SOT-353 3615,-2868.98 r0 top

## Footprints (in the part's own frame and the unit in brackets; to place one, negate y for a bottom-side part, rotate by r counter-clockwise, add the part's x,y. Pads: shape width x height; smd on the part's side, far side on the other; paste and mask are expansions set on the pad)
0402_Resistor [mm]
  rect 0.9x0.7 smd: 1(-0.65,0) 2(0.65,0)
  silkscreen extent -1.4,-0.65 1.4,0.65
0603_CAPACITOR [mm] "Chip Capacitor, 2-Leads, Body 1.60x0.80mm, IPC Medium Density"
  rect 1.05x1 smd: 1(-0.75,0) 2(0.75,0)
  silkscreen extent -1.6,-0.85 1.6,0.85, body extent -0.88,-0.48 0.87,0.47, height 0.85
0603_RESISTOR [mm]
  rect 1.05x1.05 smd: 1(-0.875,0) 2(0.875,0)
  silkscreen extent -1.85,-1 1.85,1, body extent -0.85,-0.48 0.85,0.48, height 0.6
0805_CAPACITOR [mm] "Chip Capacitor, 2-Leads, Body 2.00x1.25mm, IPC Low Density"
  rect 1.5x1.55 smd: 1(-0.9,0) 2(0.9,0)
  silkscreen extent -2.1,-1.25 2.1,1.25, body extent -1.1,-0.72 1.1,0.72, height 1.1
CON_USB_C_SMD [mm] "12401610E4"
  oval 0.85x1.45 hole 0.55 slot 1.15 at 90 deg mask+0.05: 1(-4.49,-2.835) 2(4.49,-2.835) 3(-4.13,3.115) 4(4.13,3.115)
  rect 0.3x0.7 smd paste+0 mask+0.05: A1(-2.75,5.025) A2(-2.25,5.025) A3(-1.75,5.025) A4(-1.25,5.025) A5(-0.75,5.025) A6(-0.25,5.025) A7(0.25,5.025) A8(0.75,5.025) A9(1.25,5.025) A10(1.75,5.025) A11(2.25,5.025) A12(2.75,5.025) B1(2.5,3.325) B2(2,3.325) B3(1.5,3.325) B4(1,3.325) B5(0.5,3.325) B6(0,3.325) B7(-0.5,3.325) B8(-1,3.325) B9(-1.5,3.325) B10(-2,3.325) B11(-2.5,3.325) B12(-3,3.325)
  round 0.675 hole 0.675 unplated mask+0: ""(-3.6,4.365)
  oval 1.2x0.875 hole 0.875 slot 1.2 at 0 deg unplated mask+0: ""(3.6,4.366)
  silkscreen extent -4.6,-1.79 4.6,6.1, body extent -4.63,-5.25 4.57,5.25, height 3.44
CUI_PJ-102AH [mm]
  oval 1.508x3.016 hole 1 square: 1(-6.5,0) 2(-0.5,0)
  oval 3.016x1.508 hole 1 square: 3(-3.5,4.7)
  silkscreen extent -8.3,-4.5 7.2,4.5, body extent -7.2,-4.7 7.2,4.7, height 11
LED_APT1608LZGCK [mm] "GREEN LED SMT"
  rect 0.8x0.8 smd paste+0 mask+0: 1(0.825,0) 2(-0.825,0)
  silkscreen extent -1.6,-0.7 2.22,0.7
SAMTEC_BTE-040-01-F-D-A [mm]
  rect 0.457x1.44 smd: 01(-15.6,3.086) 02(-15.6,-3.086) 03(-14.8,3.086) 04(-14.8,-3.086) 05(-14,3.086) 06(-14,-3.086) 07(-13.2,3.086) 08(-13.2,-3.086) 09(-12.4,3.086) 10(-12.4,-3.086) 11(-11.6,3.086) 12(-11.6,-3.086) 13(-10.8,3.086) 14(-10.8,-3.086) 15(-10,3.086) 16(-10,-3.086) 17(-9.2,3.086) 18(-9.2,-3.086) 19(-8.4,3.086) 20(-8.4,-3.086) 21(-7.6,3.086) 22(-7.6,-3.086) 23(-6.8,3.086) 24(-6.8,-3.086) 25(-6,3.086) 26(-6,-3.086) 27(-5.2,3.086) 28(-5.2,-3.086) 29(-4.4,3.086) 30(-4.4,-3.086) 31(-3.6,3.086) 32(-3.6,-3.086) 33(-2.8,3.086) 34(-2.8,-3.086) 35(-2,3.086) 36(-2,-3.086) 37(-1.2,3.086) 38(-1.2,-3.086) 39(-0.4,3.086) 40(-0.4,-3.086) 41(0.4,3.086) 42(0.4,-3.086) 43(1.2,3.086) 44(1.2,-3.086) 45(2,3.086) 46(2,-3.086) 47(2.8,3.086) 48(2.8,-3.086) 49(3.6,3.086) 50(3.6,-3.086) 51(4.4,3.086) 52(4.4,-3.086) 53(5.2,3.086) 54(5.2,-3.086) 55(6,3.086) 56(6,-3.086) 57(6.8,3.086) 58(6.8,-3.086) 59(7.6,3.086) 60(7.6,-3.086) 61(8.4,3.086) 62(8.4,-3.086) 63(9.2,3.086) 64(9.2,-3.086) 65(10,3.086) 66(10,-3.086) 67(10.8,3.086) 68(10.8,-3.086) 69(11.6,3.086) 70(11.6,-3.086) 71(12.4,3.086) 72(12.4,-3.086) 73(13.2,3.086) 74(13.2,-3.086) 75(14,3.086) 76(14,-3.086) 77(14.8,3.086) 78(14.8,-3.086) 79(15.6,3.086) 80(15.6,-3.086)
  round 1.016 hole 1.016 unplated: ""(-17.238,2.032) ""(17.238,2.032)
  silkscreen extent -18.75,-3.19 18,3.19, body extent -18,-3.56 18,3.56, height 4.27
SAMTEC_SSW-120-01-F-D [mm]
  rect 1.39x1.39 hole 1.04: 01(0,0)
  round 1.39 hole 1.04: 02(0,2.54) 03(-2.54,0) 04(-2.54,2.54) 05(-5.08,0) 06(-5.08,2.54) 07(-7.62,0) 08(-7.62,2.54) 09(-10.16,0) 10(-10.16,2.54) 11(-12.7,0) 12(-12.7,2.54) 13(-15.24,0) 14(-15.24,2.54) 15(-17.78,0) 16(-17.78,2.54) 17(-20.32,0) 18(-20.32,2.54) 19(-22.86,0) 20(-22.86,2.54) 21(-25.4,0) 22(-25.4,2.54) 23(-27.94,0) 24(-27.94,2.54) 25(-30.48,0) 26(-30.48,2.54) 27(-33.02,0) 28(-33.02,2.54) 29(-35.56,0) 30(-35.56,2.54) 31(-38.1,0) 32(-38.1,2.54) 33(-40.64,0) 34(-40.64,2.54) 35(-43.18,0) 36(-43.18,2.54) 37(-45.72,0) 38(-45.72,2.54) 39(-48.26,0) 40(-48.26,2.54)
  silkscreen extent -49.79,-1.21 2.27,3.75, body extent -49.78,-1.21 1.52,3.75, height 8.51
SMTC-TSW-103-07-X-S [mm] ".025 SQ Post Terminal Strip Assembly, 1x3 Pins, Vertical, 2.54mm Pitch, Male"
  rect 1.55x1.55 hole 1.02: 1(0,0)
  round 1.55 hole 1.02: 2(2.54,0) 3(5.08,0)
  silkscreen extent -1.46,-1.27 6.54,1.27, body extent -1.27,-1.27 6.35,1.27, height 8.38
SOT-353 [mm] "SOT-353 Package - 5 Pins"
  rect 0.95x0.4 smd paste-2539.97 mask+0.05: 1(-1.1,0.65) 2(-1.1,0) 3(-1.1,-0.65) 4(1.1,-0.65) 5(1.1,0.65)
  silkscreen extent -1.42,-1.58 0.75,1.6
SW_DS04-254-2-04BK-SMT-TR [mm]
  rect 1.5x1.1 smd: 1A(-4.45,3.81) 1B(4.45,3.81) 2A(-4.45,1.27) 2B(4.45,1.27) 3A(-4.45,-1.27) 3B(4.45,-1.27) 4A(-4.45,-3.81) 4B(4.45,-3.81)
  silkscreen extent -5.85,-5.58 3.1,5.58, body extent -4.95,-5.57 4.95,5.59, height 3.09
TTSOP_16 [mm]
  rect 1.5x0.45 smd paste+0 mask+0: 1(-2.9,2.275) 2(-2.9,1.625) 3(-2.9,0.975) 4(-2.9,0.325) 5(-2.9,-0.325) 6(-2.9,-0.975) 7(-2.9,-1.625) 8(-2.9,-2.275) 9(2.9,-2.275) 10(2.9,-1.625) 11(2.9,-0.975) 12(2.9,-0.325) 13(2.9,0.325) 14(2.9,0.975) 15(2.9,1.625) 16(2.9,2.275)
  silkscreen extent -4.87,-2.75 4,2.75

## Part data
C1 C2 C3 C4 C6_A C6_B C6_C C6_D C6_E C6_F C6_G C6_H C7_A C7_B C7_C C7_D C7_E C7_F C7_G C7_H C8_A C8_B C8_C C8_D C8_E C8_F C8_G C8_H C9_A C9_B C9_C C9_D C9_E C9_F C9_G C9_H C10_A C10_B C10_C C10_D C10_E C10_F C10_G C10_H C11_A C11_B C11_C C11_D C11_E C11_F C11_G C11_H: library part Capacitor, "Capacitor"
D1_A D1_B D1_C D1_D D1_E D1_F D1_G D1_H: library part LED_GREEN, "GREEN LED"
J1 J6: library part CON_FPGA_SMD, "80 Position Connector Header, Outer Shroud Contacts Surface Mount Gold", Package=None, Availability=Unavailable, MF=Samtec, MP=BTE-040-01-F-D-A, Price=None
J2 J3 J4: library part CON_HEADF_2X20, "40 Position Receptacle Connector 0.100\" (2.54mm) Through Hole Gold", Package=None, Availability=Unavailable, MF=Samtec, MP=SSW-120-01-F-D, Price=None
J5: library part CON_HEADER_1X3, "0.025\" SQ Post Header, Through-hole, Vertical, -55 to 125 degC, 2.54 mm Pitch, 3-Pin, Male, RoHS"
J9: library part CON_PWR_24V_5A, "Power Barrel Connector Jack 2.00mm ID (0.079\"), 5.50mm OD (0.217\") Through Hole, Right Angle", Package=None, Check_prices=https://www.snapeda.com/parts/PJ-102AH/Same+Sky/view-part/?ref=eda, MF="Same Sky", MP=PJ-102AH, SnapEDA_Link=https://www.snapeda.com/parts/PJ-102AH/Same+Sky/view-part/?ref=snap
J10_A J10_B J10_C J10_D J10_E J10_F J10_G J10_H: library part CON_USBC_TH_SMT, "USB-C (USB TYPE-C) USB 3.2 Gen 1 (USB 3.1 Gen 1, Superspeed (USB 3.0)) Receptacle Connector 24 Position Through Hole, Right Angle"
R1 R2 R3 R4 R5 R6_A R6_B R6_C R6_D R6_E R6_F R6_G R6_H R7_A R7_B R7_C R7_D R7_E R7_F R7_G R7_H R8_A R8_B R8_C R8_D R8_E R8_F R8_G R8_H R9_A R9_B R9_C R9_D R9_E R9_F R9_G R9_H R10_A R10_B R10_C R10_D R10_E R10_F R10_G R10_H R11 R12: library part Resistor, "Resistor", GRAMS Lib Spec=2.7
S1: library part SW_DIP_4_SMT, "Dip Switch SPST 4 Position Surface Mount Slide (Standard) Actuator 25mA 24VDC", Package=None, Check_prices=https://www.snapeda.com/parts/DS04-254-2-04BK-SMT-TR/Same+Sky/view-part/?ref=eda, MF="Same Sky", MP=DS04-254-2-04BK-SMT-TR, SnapEDA_Link=https://www.snapeda.com/parts/DS04-254-2-04BK-SMT-TR/Same+Sky/view-part/?ref=snap
U1_A U1_B U1_C U1_D U1_E U1_F U1_G U1_H: library part IC_LVDS_TX4, "LVDS Transceiver 4 Channels with Enable"
U2_A U2_B U2_C U2_D U2_E U2_F U2_G U2_H: library part IC_LVDS_RX4, "LVDS Receiver 4 Channels with Enable"
U3: library part IC_OP_AMP_1CH, "CMOS Amplifier 1 Circuit Rail-to-Rail SC-70-5 / 1.8V - 5.5V"

## Free pads (board coordinates)
  round 196.85 hole 98.43: MH(250,-2995) MH(250,3005) MH(330,-866.14) MH(330,866.14) MH(3046.54,-866.14) MH(3046.54,866.14) MH(5730,-2995) MH(5730,3005)

## Via types
v1: diameter 14, hole 8, Top to Bottom, tented both sides, 2392 vias
v2: diameter 24, hole 12, Top to Bottom, tented both sides, 293 vias

## Nets (pads, with @x,y where several pads share a name; then routed paths per layer and width w, separated by ;. In a path a pad name is that pad's centre, name@x,y a point inside that pad or via, vN(x,y) a via of type N, cw(c..) or ccw(c..) an arc to the next point about the centre after c; other vN are vias at no path point)
1V0: J1.04 J1.06 J3.01 J3.02 | length 3439.6
  Top w10: J3.02@500,-2100 J3.01@500,-2000 551,-1949 551,-98 1195.14,546.14 1529.14,546.14 1578.23,595.23 J1.04@1578.23,665.83 J1.06@1609.72,665.83
1V8: J1.07 J2.06 | length 1364.4
  Top w10: J2.06@700,1700 700,1610 1072,1238 1385,1238 1641.22,981.78 J1.07@1641.22,908.82
3V3: C4.2 C6_A.2 C6_B.2 C6_C.2 C6_D.2 C6_E.2 C6_F.2 C6_G.2 C6_H.2 C7_A.2 C7_B.2 C7_C.2 C7_D.2 C7_E.2 C7_F.2 C7_G.2 C7_H.2 C8_A.1 C8_B.1 C8_C.1 C8_D.1 C8_E.1 C8_F.1 C8_G.1 C8_H.1 C9_A.1 C9_B.1 C9_C.1 C9_D.1 C9_E.1 C9_F.1 C9_G.1 C9_H.1 C10_A.1 C10_B.1 C10_C.1 C10_D.1 C10_E.1 C10_F.1 C10_G.1 C10_H.1 C11_A.1 C11_B.1 C11_C.1 C11_D.1 C11_E.1 C11_F.1 C11_G.1 C11_H.1 J1.09 J1.11 J1.13 J2.05 J2.07 J2.08 J4.32 J4.34 J4.36 J4.38 J4.40 J6.02 J6.04 J6.06 J10_A.A4 J10_A.A9 J10_A.B4 J10_A.B9 J10_B.A4 J10_B.A9 J10_B.B4 J10_B.B9 J10_C.A4 J10_C.A9 J10_C.B4 J10_C.B9 J10_D.A4 J10_D.A9 J10_D.B4 J10_D.B9 J10_E.A4 J10_E.A9 J10_E.B4 J10_E.B9 J10_F.A4 J10_F.A9 J10_F.B4 J10_F.B9 J10_G.A4 J10_G.A9 J10_G.B4 J10_G.B9 J10_H.A4 J10_H.A9 J10_H.B4 J10_H.B9 R1.1 R2.2 R3.2 R4.2 R5.2 U1_A.4 U1_B.4 U1_C.4 U1_D.4 U1_E.4 U1_F.4 U1_G.4 U1_H.4 U2_A.13 U2_B.13 U2_C.13 U2_D.13 U2_E.13 U2_F.13 U2_G.13 U2_H.13 U3.5 | length 10896
  Top w10: J6.02@1546.73,-908.98 v2(1546.73,-828.8) ; J6.04@1578.23,-908.98 v2(1578.23,-791.8) ; J6.06@1609.72,-908.98 v2(1609.72,-828.8) ; J1.09@1672.72,908.82 v2(1672.72,1026) ; J1.11@1704.21,908.82 v2(1704.21,1060) ; J1.13@1735.71,908.82 v2(1735.71,1026) ; v2(2110,2300) R4.2@2195.55,2300 ; v2(2110,2455.55) 2110.55,2455 R5.2@2195.55,2455 ; R3.2@2634.45,2300 v2(2720,2300) ; R2.2@2634.45,2455 2719.45,2455 v2(2720,2455.55) ; R1.1@3430,-2825.08 v2(3430,-2745) ; U3.5@3658.31,-2843.39 3658.31,-2821.69 3705.47,-2774.53 C4.2@3705.47,-2733.98 v2(3705.47,-2645) ; v2(4565,-2775) 4566.14,-2773.86 C11_A.1@4745,-2773.86 4746.06,-2772.8 U2_A.13@4910.83,-2772.8 ; v2(4565,-2390.47) 4566.14,-2389.33 C8_A.1@4630,-2389.33 ; v2(4565,-2075) 4566.14,-2073.86 C10_B.1@4630,-2073.86 C11_B.1@4745,-2073.86 4746.06,-2072.8 U2_B.13@4910.83,-2072.8 ; v2(4565,-1692.33) 4627,-1692.33 C8_B.1@4630,-1689.33 ; v2(4565,-1375) 4566.14,-1373.86 C10_C.1@4630,-1373.86 C11_C.1@4745,-1373.86 4746.06,-1372.8 U2_C.13@4910.83,-1372.8 ; v2(4565,-990.47) 4566.14,-989.33 C8_C.1@4630,-989.33 ; v2(4565,-675) 4566.14,-673.86 C10_D.1@4630,-673.86 C11_D.1@4745,-673.86 4746.06,-672.8 U2_D.13@4910.83,-672.8 ; v2(4565,-290.47) 4566.14,-289.33 C8_D.1@4630,-289.33 ; v2(4565,25) 4566.14,26.14 C10_E.1@4630,26.14 C11_E.1@4745,26.14 4746.06,27.2 U2_E.13@4910.83,27.2 ; v2(4565,409.53) 4566.14,410.67 C8_E.1@4630,410.67 ; v2(4565,725) 4566.14,726.14 C10_F.1@4630,726.14 C11_F.1@4745,726.14 4746.06,727.2 U2_F.13@4910.83,727.2 ; v2(4565,1109.53) 4566.14,1110.67 C8_F.1@4630,1110.67 ; v2(4565,1425) 4566.14,1426.14 C10_G.1@4630,1426.14 C11_G.1@4745,1426.14 4746.06,1427.2 U2_G.13@4910.83,1427.2 ; v2(4565,1809.53) 4566.14,1810.67 C8_G.1@4630,1810.67 ; v2(4565,2125) 4566.14,2126.14 C10_H.1@4630,2126.14 C11_H.1@4745,2126.14 4746.06,2127.2 U2_H.13@4910.83,2127.2 ; v2(4565,2509.53) 4566.14,2510.67 C8_H.1@4630,2510.67 ; C8_A.1@4630,-2390.47 C9_A.1@4745,-2390.47 4753.27,-2382.2 U1_A.4@4910.83,-2382.2 ; C8_B.1@4630,-1690.47 C9_B.1@4745,-1690.47 4753.27,-1682.2 U1_B.4@4910.83,-1682.2 ; C8_C.1@4630,-990.47 C9_C.1@4745,-990.47 4753.27,-982.2 U1_C.4@4910.83,-982.2 ; C8_D.1@4630,-290.47 C9_D.1@4745,-290.47 4753.27,-282.2 U1_D.4@4910.83,-282.2 ; C8_E.1@4630,409.53 C9_E.1@4745,409.53 4753.27,417.8 U1_E.4@4910.83,417.8 ; C8_F.1@4630,1109.53 C9_F.1@4745,1109.53 4753.27,1117.8 U1_F.4@4910.83,1117.8 ; C8_G.1@4630,1809.53 C9_G.1@4745,1809.53 4753.27,1817.8 U1_G.4@4910.83,1817.8 ; C8_H.1@4630,2509.53 C9_H.1@4745,2509.53 4753.27,2517.8 U1_H.4@4910.83,2517.8 ; v2(5300,-2360.55) C7_A.2@5375,-2360.55 C6_A.2@5490,-2360.55 ; v2(5300,-1660.55) C7_B.2@5375,-1660.55 C6_B.2@5490,-1660.55 ; v2(5300,-960.55) C7_C.2@5375,-960.55 C6_C.2@5490,-960.55 ; v2(5300,-260.55) C7_D.2@5375,-260.55 C6_D.2@5490,-260.55 ; v2(5300,439.45) C7_E.2@5375,439.45 C6_E.2@5490,439.45 ; v2(5300,1139.45) C7_F.2@5375,1139.45 C6_F.2@5490,1139.45 ; v2(5300,1839.45) C7_G.2@5375,1839.45 C6_G.2@5490,1839.45 ; v2(5300,2539.45) C7_H.2@5375,2539.45 C6_H.2@5490,2539.45 ; v1(5571.42,-2499.21) J10_A.A4@5607.17,-2499.21 5635.28,-2499.21 5645.13,-2509.06 J10_A.B9@5674.09,-2509.06 ; v1(5571.42,1000.79) J10_F.A4@5607.17,1000.79 5635.28,1000.79 5645.13,990.94 J10_F.B9@5674.09,990.94 ; v1(5571.42,1700.79) J10_G.A4@5607.17,1700.79 5635.28,1700.79 5645.13,1690.94 J10_G.B9@5674.09,1690.94 ; v1(5571.42,2400.79) J10_H.A4@5607.17,2400.79 5635.28,2400.79 5645.13,2390.94 J10_H.B9@5674.09,2390.94 ; v1(5576.74,-2401.11) 5577.06,-2400.79 J10_A.A9@5607.17,-2400.79 5621.78,-2400.79 5631.62,-2410.63 J10_A.B4@5674.09,-2410.63 ; v1(5576.74,1098.89) 5577.06,1099.21 J10_F.A9@5607.17,1099.21 5621.78,1099.21 5631.62,1089.37 J10_F.B4@5674.09,1089.37 ; v1(5576.74,1798.89) 5577.06,1799.21 J10_G.A9@5607.17,1799.21 5621.78,1799.21 5631.62,1789.37 J10_G.B4@5674.09,1789.37 ; v1(5576.74,2498.89) 5577.06,2499.21 J10_H.A9@5607.17,2499.21 5621.78,2499.21 5631.62,2489.37 J10_H.B4@5674.09,2489.37 ; v1@5577.06,-1700.79 v1(5576.74,-1701.11) v1@5577.06,-1700.79 ; v1@5577.06,-1700.79 J10_B.A9@5607.17,-1700.79 ; v1@5577.06,-1700.79 J10_B.A9@5607.17,-1700.79 ; v1@5577.06,-1000.79 v1(5576.74,-1001.11) v1@5577.06,-1000.79 ; v1@5577.06,-1000.79 J10_C.A9@5607.17,-1000.79 ; v1@5577.06,-1000.79 J10_C.A9@5607.17,-1000.79 ; v1@5577.06,-300.79 v1(5576.74,-301.11) v1@5577.06,-300.79 ; v1@5577.06,-300.79 J10_D.A9@5607.17,-300.79 ; v1@5577.06,-300.79 J10_D.A9@5607.17,-300.79 ; v1@5577.06,399.21 v1(5576.74,398.89) v1@5577.06,399.21 ; v1@5577.06,399.21 J10_E.A9@5607.17,399.21 ; v1@5577.06,399.21 J10_E.A9@5607.17,399.21 ; J10_B.A4@5607.17,-1799.21 v1(5571.42,-1799.21) J10_B.A4@5607.17,-1799.21 ; J10_B.A4@5607.17,-1799.21 5635.28,-1799.21 ; J10_B.A4@5607.17,-1799.21 5635.28,-1799.21 ; J10_B.A9@5607.17,-1700.79 5621.78,-1700.79 ; J10_B.A9@5607.17,-1700.79 5621.78,-1700.79 ; J10_C.A4@5607.17,-1099.21 v1(5571.42,-1099.21) J10_C.A4@5607.17,-1099.21 ; J10_C.A4@5607.17,-1099.21 5635.28,-1099.21 ; J10_C.A4@5607.17,-1099.21 5635.28,-1099.21 ; J10_C.A9@5607.17,-1000.79 5621.78,-1000.79 ; J10_C.A9@5607.17,-1000.79 5621.78,-1000.79 ; J10_D.A4@5607.17,-399.21 v1(5571.42,-399.21) J10_D.A4@5607.17,-399.21 ; J10_D.A4@5607.17,-399.21 5635.28,-399.21 ; J10_D.A4@5607.17,-399.21 5635.28,-399.21 ; J10_D.A9@5607.17,-300.79 5621.78,-300.79 ; J10_D.A9@5607.17,-300.79 5621.78,-300.79 ; J10_E.A4@5607.17,300.79 v1(5571.42,300.79) J10_E.A4@5607.17,300.79 ; J10_E.A4@5607.17,300.79 5635.28,300.79 ; J10_E.A4@5607.17,300.79 5635.28,300.79 ; J10_E.A9@5607.17,399.21 5621.78,399.21 ; J10_E.A9@5607.17,399.21 5621.78,399.21 ; 5621.78,-1700.79 5631.62,-1710.63 ; 5621.78,-1700.79 5631.62,-1710.63 ; 5621.78,-1000.79 5631.62,-1010.63 ; 5621.78,-1000.79 5631.62,-1010.63 ; 5621.78,-300.79 5631.62,-310.63 ; 5621.78,-300.79 5631.62,-310.63 ; 5621.78,399.21 5631.62,389.37 ; 5621.78,399.21 5631.62,389.37 ; 5631.62,-1710.63 J10_B.B4@5674.09,-1710.63 5631.62,-1710.63 ; 5631.62,-1010.63 J10_C.B4@5674.09,-1010.63 5631.62,-1010.63 ; 5631.62,-310.63 J10_D.B4@5674.09,-310.63 5631.62,-310.63 ; 5631.62,389.37 J10_E.B4@5674.09,389.37 5631.62,389.37 ; 5635.28,-1799.21 5645.13,-1809.06 ; 5635.28,-1799.21 5645.13,-1809.06 ; 5635.28,-1099.21 5645.13,-1109.06 ; 5635.28,-1099.21 5645.13,-1109.06 ; 5635.28,-399.21 5645.13,-409.06 ; 5635.28,-399.21 5645.13,-409.06 ; 5635.28,300.79 5645.13,290.94 ; 5635.28,300.79 5645.13,290.94 ; 5645.13,-1809.06 J10_B.B9@5674.09,-1809.06 5645.13,-1809.06 ; 5645.13,-1109.06 J10_C.B9@5674.09,-1109.06 5645.13,-1109.06 ; 5645.13,-409.06 J10_D.B9@5674.09,-409.06 5645.13,-409.06 ; 5645.13,290.94 J10_E.B9@5674.09,290.94 5645.13,290.94
5V0: C1.2 C2.2 C3.2 J1.01 J1.03 J1.05 J2.01 J2.02 J2.03 J9.1 | length 60.8
  Top w15: J1.01@1546.73,908.82 J1.03@1578.23,908.82 J1.05@1607.53,908.82
board_mode_0: J1.32 J3.13 R2.1 S1.4A | length 6266.3
  Top w8: J3.13@1100,-2000 844,-1744 844,-323 1391,224 1674,224 2019.17,569.17 J1.32@2019.17,665.83 v2(2019.17,783) ; v2(2400,2225) 2400,2289.45 R2.1@2565.55,2455 2565.55,2609.25 S1.4A@2565,2609.8
  Bottom w8: v2(2019.17,783) 2019.17,811.17 2106,898 2668,898 2813,1043 2813,1812 v2(2400,2225)
board_mode_1: J1.34 J3.16 R3.1 S1.3A | length 7053
  Top w8: J1.34@2050.67,665.83 v2(2050.67,746) ; v2(2463,2225) 2463,2266 2497,2300 R3.1@2565.55,2300 2565.55,2345.55 2598,2378 2720,2378 2766,2424 2766,2601 2669,2698 2497,2698 2465,2666 S1.3A@2465,2609.8
  Bottom w8: J3.16@1200,-2100 1150,-2050 1150,-1904 801,-1555 801,-283 1465,381 1685.67,381 v2(2050.67,746) 2080,775.33 2080,817 2130.32,867.32 2684.32,867.32 2845.17,1028.17 2845.17,1842.83 v2(2463,2225)
board_mode_2: J1.38 J3.18 R4.1 S1.2A | length 6754.9
  Top w8: J1.38@2113.66,665.83 v2(2113.66,746) ; v2(2365,2300) R4.1@2264.45,2300 2264.45,2349.45 2293,2378 2342,2378 2403,2439 2403,2491 2365,2529 S1.2A@2365,2609.8
  Bottom w8: J3.18@1300,-2100 1250,-2050 1250,-1909 842,-1501 842,-307 1496,347 1714.66,347 v2(2113.66,746) 2113.66,806.66 2146,839 2700,839 2880,1019 2880,1830 2879,1831 2879,1893 2472,2300 v2(2365,2300)
board_mode_3: J1.40 J3.17 R5.1 S1.1A | length 6365.2
  Top w8: J3.17@1300,-2000 935,-1635 935,-404 1454,115 1696,115 2145.16,564.16 J1.40@2145.16,665.83 v2(2145.16,783) ; S1.1A@2265,2609.8 2264.45,2609.25 R5.1@2264.45,2455 2265,2455.55 v2(2365,2455.55)
  Bottom w8: v2(2145.16,783) 2170.16,808 2710,808 2911,1009 2911,1909.55 v2(2365,2455.55)
C\S\_A: J6.16 U1_A.6 | length 3941
  Top w8: J6.16@1767.2,-908.98 1767.2,-1192.2 2455,-1880 3070,-1880 3623.39,-2433.39 v2(4515,-2433.39) ; v2(4828.52,-2433.39) U1_A.6@4910.83,-2433.39
  Bottom w8: v2(4515,-2433.39) v2(4828.52,-2433.39)
C\S\_A_N: J10_A.B11 U1_A.12 | length 781.9
  Top w6.3: U1_A.12@5139.17,-2407.8 5132.03,-2414.94 5095.32,-2414.94 5068.7,-2441.56 5068.7,-2513.61 5099.32,-2544.23 5366.65,-2544.23 v1(5370,-2547.58) ; v1(5640,-2547.58) 5643.35,-2544.23 5669.9,-2544.23 J10_A.B11@5674.09,-2548.43
  Bottom w6.3: v1(5370,-2547.58) 5373.35,-2544.23 5636.65,-2544.23 v1(5640,-2547.58)
C\S\_A_P: J10_A.B10 U1_A.11 | length 744.4
  Top w6.3: U1_A.11@5139.17,-2433.39 5132.03,-2426.24 5100,-2426.24 5080,-2446.24 5080,-2508.93 5104,-2532.93 5366.65,-2532.93 v1(5370,-2529.58) ; v1(5640,-2529.58) 5643.35,-2532.93 5669.9,-2532.93 J10_A.B10@5674.09,-2528.74
  Bottom w6.3: v1(5370,-2529.58) 5373.35,-2532.93 5636.65,-2532.93 v1(5640,-2529.58)
C\S\_B: J6.28 U1_B.6 | length 3414.6
  Top w8: J6.28@1956.18,-908.98 1956.18,-1106.18 2535,-1685 4466.61,-1685 v2(4518.54,-1736.93) ; v2(4828.52,-1733.39) U1_B.6@4910.83,-1733.39
  Bottom w8: v2(4518.54,-1736.93) 4520.31,-1735.16 4826.75,-1735.16 v2(4828.52,-1733.39)
C\S\_B_N: J10_B.B11 U1_B.12 | length 1563.8
  Top w6.3: 5068.7,-1813.61 5068.7,-1741.56 ; 5068.7,-1813.61 5099.32,-1844.23 ; 5068.7,-1813.61 5099.32,-1844.23 ; 5068.7,-1813.61 5068.7,-1741.56 ; 5068.7,-1741.56 5095.32,-1714.94 ; 5068.7,-1741.56 5095.32,-1714.94 ; 5095.32,-1714.94 U1_B.12@5132.03,-1714.94 ; 5095.32,-1714.94 U1_B.12@5132.03,-1714.94 ; 5099.32,-1844.23 v1@5366.65,-1844.23 ; 5099.32,-1844.23 v1@5366.65,-1844.23 ; U1_B.12@5132.03,-1714.94 U1_B.12@5139.17,-1707.8 U1_B.12@5132.03,-1714.94 ; v1@5366.65,-1844.23 v1(5370,-1847.58) v1@5366.65,-1844.23 ; v1@5643.35,-1844.23 J10_B.B11@5669.9,-1844.23 ; v1@5643.35,-1844.23 v1(5640,-1847.58) v1@5643.35,-1844.23 ; v1@5643.35,-1844.23 J10_B.B11@5669.9,-1844.23 ; J10_B.B11@5669.9,-1844.23 J10_B.B11@5674.09,-1848.43 J10_B.B11@5669.9,-1844.23
  Bottom w6.3: v1@5373.35,-1844.23 v1@5636.65,-1844.23 ; v1@5373.35,-1844.23 v1(5370,-1847.58) v1@5373.35,-1844.23 ; v1@5373.35,-1844.23 v1@5636.65,-1844.23 ; v1@5636.65,-1844.23 v1(5640,-1847.58) v1@5636.65,-1844.23
C\S\_B_P: J10_B.B10 U1_B.11 | length 1488.8
  Top w6.3: 5080,-1808.93 5104,-1832.93 ; 5080,-1808.93 5080,-1746.24 ; 5080,-1808.93 5080,-1746.24 ; 5080,-1808.93 5104,-1832.93 ; 5080,-1746.24 5100,-1726.24 ; 5080,-1746.24 5100,-1726.24 ; 5100,-1726.24 U1_B.11@5132.03,-1726.24 ; 5100,-1726.24 U1_B.11@5132.03,-1726.24 ; 5104,-1832.93 v1@5366.65,-1832.93 ; 5104,-1832.93 v1@5366.65,-1832.93 ; U1_B.11@5132.03,-1726.24 U1_B.11@5139.17,-1733.39 U1_B.11@5132.03,-1726.24 ; v1@5366.65,-1832.93 v1(5370,-1829.58) v1@5366.65,-1832.93 ; v1@5643.35,-1832.93 J10_B.B10@5669.9,-1832.93 ; v1@5643.35,-1832.93 v1(5640,-1829.58) v1@5643.35,-1832.93 ; v1@5643.35,-1832.93 J10_B.B10@5669.9,-1832.93 ; J10_B.B10@5669.9,-1832.93 J10_B.B10@5674.09,-1828.74 J10_B.B10@5669.9,-1832.93
  Bottom w6.3: v1@5373.35,-1832.93 v1@5636.65,-1832.93 ; v1@5373.35,-1832.93 v1(5370,-1829.58) v1@5373.35,-1832.93 ; v1@5373.35,-1832.93 v1@5636.65,-1832.93 ; v1@5636.65,-1832.93 v1(5640,-1829.58) v1@5636.65,-1832.93
C\S\_C: J6.42 U1_C.6 | length 3260.6
  Top w8: J6.42@2176.65,-908.98 2176.65,-1068.54 2601.97,-1493.86 3804.19,-1493.86 4264.66,-1033.39 v2(4515,-1033.39) ; v2(4828.52,-1033.39) U1_C.6@4910.83,-1033.39
  Bottom w8: v2(4515,-1033.39) v2(4828.52,-1033.39)
C\S\_C_N: J10_C.B11 U1_C.12 | length 1563.8
  Top w6.3: 5068.7,-1113.61 5068.7,-1041.56 ; 5068.7,-1113.61 5099.32,-1144.23 ; 5068.7,-1113.61 5068.7,-1041.56 ; 5068.7,-1113.61 5099.32,-1144.23 ; 5068.7,-1041.56 5095.32,-1014.94 ; 5068.7,-1041.56 5095.32,-1014.94 ; 5095.32,-1014.94 U1_C.12@5132.03,-1014.94 ; 5095.32,-1014.94 U1_C.12@5132.03,-1014.94 ; 5099.32,-1144.23 v1@5366.65,-1144.23 ; 5099.32,-1144.23 v1@5366.65,-1144.23 ; U1_C.12@5132.03,-1014.94 U1_C.12@5139.17,-1007.8 U1_C.12@5132.03,-1014.94 ; v1@5366.65,-1144.23 v1(5370,-1147.58) v1@5366.65,-1144.23 ; v1@5643.35,-1144.23 J10_C.B11@5669.9,-1144.23 ; v1@5643.35,-1144.23 v1(5640,-1147.58) v1@5643.35,-1144.23 ; v1@5643.35,-1144.23 J10_C.B11@5669.9,-1144.23 ; J10_C.B11@5669.9,-1144.23 J10_C.B11@5674.09,-1148.43 J10_C.B11@5669.9,-1144.23
  Bottom w6.3: v1@5373.35,-1144.23 v1@5636.65,-1144.23 ; v1@5373.35,-1144.23 v1(5370,-1147.58) v1@5373.35,-1144.23 ; v1@5373.35,-1144.23 v1@5636.65,-1144.23 ; v1@5636.65,-1144.23 v1(5640,-1147.58) v1@5636.65,-1144.23
C\S\_C_P: J10_C.B10 U1_C.11 | length 1488.8
  Top w6.3: 5080,-1108.93 5104,-1132.93 ; 5080,-1108.93 5080,-1046.24 ; 5080,-1108.93 5104,-1132.93 ; 5080,-1108.93 5080,-1046.24 ; 5080,-1046.24 5100,-1026.24 ; 5080,-1046.24 5100,-1026.24 ; 5100,-1026.24 U1_C.11@5132.03,-1026.24 ; 5100,-1026.24 U1_C.11@5132.03,-1026.24 ; 5104,-1132.93 v1@5366.65,-1132.93 ; 5104,-1132.93 v1@5366.65,-1132.93 ; U1_C.11@5132.03,-1026.24 U1_C.11@5139.17,-1033.39 U1_C.11@5132.03,-1026.24 ; v1@5366.65,-1132.93 v1(5370,-1129.58) v1@5366.65,-1132.93 ; v1@5643.35,-1132.93 J10_C.B10@5669.9,-1132.93 ; v1@5643.35,-1132.93 v1(5640,-1129.58) v1@5643.35,-1132.93 ; v1@5643.35,-1132.93 J10_C.B10@5669.9,-1132.93 ; J10_C.B10@5669.9,-1132.93 J10_C.B10@5674.09,-1128.74 J10_C.B10@5669.9,-1132.93
  Bottom w6.3: v1@5373.35,-1132.93 v1@5636.65,-1132.93 ; v1@5373.35,-1132.93 v1(5370,-1129.58) v1@5373.35,-1132.93 ; v1@5373.35,-1132.93 v1@5636.65,-1132.93 ; v1@5636.65,-1132.93 v1(5640,-1129.58) v1@5636.65,-1132.93
C\S\_D: J6.54 U1_D.6 | length 3180.7
  Top w8: J6.54@2365.63,-908.98 2365.63,-1005.63 2680,-1320 3470,-1320 4265,-525 4456.61,-333.39 v2(4515,-333.39) ; v2(4828.52,-333.39) U1_D.6@4910.83,-333.39
  Bottom w8: v2(4515,-333.39) v2(4828.52,-333.39)
C\S\_D_N: J10_D.B11 U1_D.12 | length 1563.8
  Top w6.3: 5068.7,-413.61 5068.7,-341.56 ; 5068.7,-413.61 5099.32,-444.23 ; 5068.7,-413.61 5068.7,-341.56 ; 5068.7,-413.61 5099.32,-444.23 ; 5068.7,-341.56 5095.32,-314.94 ; 5068.7,-341.56 5095.32,-314.94 ; 5095.32,-314.94 U1_D.12@5132.03,-314.94 ; 5095.32,-314.94 U1_D.12@5132.03,-314.94 ; 5099.32,-444.23 v1@5366.65,-444.23 ; 5099.32,-444.23 v1@5366.65,-444.23 ; U1_D.12@5132.03,-314.94 U1_D.12@5139.17,-307.8 U1_D.12@5132.03,-314.94 ; v1@5366.65,-444.23 v1(5370,-447.58) v1@5366.65,-444.23 ; v1@5643.35,-444.23 J10_D.B11@5669.9,-444.23 ; v1@5643.35,-444.23 v1(5640,-447.58) v1@5643.35,-444.23 ; v1@5643.35,-444.23 J10_D.B11@5669.9,-444.23 ; J10_D.B11@5669.9,-444.23 J10_D.B11@5674.09,-448.43 J10_D.B11@5669.9,-444.23
  Bottom w6.3: v1@5373.35,-444.23 v1@5636.65,-444.23 ; v1@5373.35,-444.23 v1(5370,-447.58) v1@5373.35,-444.23 ; v1@5373.35,-444.23 v1@5636.65,-444.23 ; v1@5636.65,-444.23 v1(5640,-447.58) v1@5636.65,-444.23
C\S\_D_P: J10_D.B10 U1_D.11 | length 1488.8
  Top w6.3: 5080,-408.93 5104,-432.93 ; 5080,-408.93 5080,-346.24 ; 5080,-408.93 5104,-432.93 ; 5080,-408.93 5080,-346.24 ; 5080,-346.24 5100,-326.24 ; 5080,-346.24 5100,-326.24 ; 5100,-326.24 U1_D.11@5132.03,-326.24 ; 5100,-326.24 U1_D.11@5132.03,-326.24 ; 5104,-432.93 v1@5366.65,-432.93 ; 5104,-432.93 v1@5366.65,-432.93 ; U1_D.11@5132.03,-326.24 U1_D.11@5139.17,-333.39 U1_D.11@5132.03,-326.24 ; v1@5366.65,-432.93 v1(5370,-429.58) v1@5366.65,-432.93 ; v1@5643.35,-432.93 J10_D.B10@5669.9,-432.93 ; v1@5643.35,-432.93 v1(5640,-429.58) v1@5643.35,-432.93 ; v1@5643.35,-432.93 J10_D.B10@5669.9,-432.93 ; J10_D.B10@5669.9,-432.93 J10_D.B10@5674.09,-428.74 J10_D.B10@5669.9,-432.93
  Bottom w6.3: v1@5373.35,-432.93 v1@5636.65,-432.93 ; v1@5373.35,-432.93 v1(5370,-429.58) v1@5373.35,-432.93 ; v1@5373.35,-432.93 v1@5636.65,-432.93 ; v1@5636.65,-432.93 v1(5640,-429.58) v1@5636.65,-432.93
C\S\_E: J6.68 U1_E.6 | length 3402.5
  Top w8: J6.68@2586.1,-908.98 2586.1,-1006.1 2750,-1170 3260,-1170 4025,-405 4025,66.61 4325,366.61 v2(4515,366.61) ; v2(4828.52,366.61) U1_E.6@4910.83,366.61
  Bottom w8: v2(4515,366.61) v2(4828.52,366.61)
C\S\_E_N: J10_E.B11 U1_E.12 | length 1563.8
  Top w6.3: 5068.7,286.39 5068.7,358.44 ; 5068.7,286.39 5099.32,255.77 ; 5068.7,286.39 5068.7,358.44 ; 5068.7,286.39 5099.32,255.77 ; 5068.7,358.44 5095.32,385.06 ; 5068.7,358.44 5095.32,385.06 ; 5095.32,385.06 U1_E.12@5132.03,385.06 ; 5095.32,385.06 U1_E.12@5132.03,385.06 ; 5099.32,255.77 v1@5366.65,255.77 ; 5099.32,255.77 v1@5366.65,255.77 ; U1_E.12@5132.03,385.06 U1_E.12@5139.17,392.2 U1_E.12@5132.03,385.06 ; v1@5366.65,255.77 v1(5370,252.42) v1@5366.65,255.77 ; v1@5643.35,255.77 J10_E.B11@5669.9,255.77 ; v1@5643.35,255.77 v1(5640,252.42) v1@5643.35,255.77 ; v1@5643.35,255.77 J10_E.B11@5669.9,255.77 ; J10_E.B11@5669.9,255.77 J10_E.B11@5674.09,251.57 J10_E.B11@5669.9,255.77
  Bottom w6.3: v1@5373.35,255.77 v1@5636.65,255.77 ; v1@5373.35,255.77 v1(5370,252.42) v1@5373.35,255.77 ; v1@5373.35,255.77 v1@5636.65,255.77 ; v1@5636.65,255.77 v1(5640,252.42) v1@5636.65,255.77
C\S\_E_P: J10_E.B10 U1_E.11 | length 1488.8
  Top w6.3: 5080,291.07 5104,267.07 ; 5080,291.07 5080,353.76 ; 5080,291.07 5104,267.07 ; 5080,291.07 5080,353.76 ; 5080,353.76 5100,373.76 ; 5080,353.76 5100,373.76 ; 5100,373.76 U1_E.11@5132.03,373.76 ; 5100,373.76 U1_E.11@5132.03,373.76 ; 5104,267.07 v1@5366.65,267.07 ; 5104,267.07 v1@5366.65,267.07 ; U1_E.11@5132.03,373.76 U1_E.11@5139.17,366.61 U1_E.11@5132.03,373.76 ; v1@5366.65,267.07 v1(5370,270.42) v1@5366.65,267.07 ; v1@5643.35,267.07 J10_E.B10@5669.9,267.07 ; v1@5643.35,267.07 v1(5640,270.42) v1@5643.35,267.07 ; v1@5643.35,267.07 J10_E.B10@5669.9,267.07 ; J10_E.B10@5669.9,267.07 J10_E.B10@5674.09,271.26 J10_E.B10@5669.9,267.07
  Bottom w6.3: v1@5373.35,267.07 v1@5636.65,267.07 ; v1@5373.35,267.07 v1(5370,270.42) v1@5373.35,267.07 ; v1@5373.35,267.07 v1@5636.65,267.07 ; v1@5636.65,267.07 v1(5640,270.42) v1@5636.65,267.07
C\S\_F: J6.77 U1_F.6 | length 3077.6
  Top w8: J6.77@2743.58,-665.98 2743.58,-605.48 2799.07,-550 3063,-550 4254.61,641.61 4385,641.61 v2(4395,651.61) ; v2(4828.52,1066.61) U1_F.6@4910.83,1066.61
  Bottom w8: v2(4395,651.61) 4395,920 4541.61,1066.61 v2(4828.52,1066.61)
C\S\_F_N: J10_F.B11 U1_F.12 | length 781.9
  Top w6.3: U1_F.12@5139.17,1092.2 5132.03,1085.06 5095.32,1085.06 5068.7,1058.44 5068.7,986.39 5099.32,955.77 5366.65,955.77 v1(5370,952.42) ; v1(5640,952.42) 5643.35,955.77 5669.9,955.77 J10_F.B11@5674.09,951.57
  Bottom w6.3: v1(5370,952.42) 5373.35,955.77 5636.65,955.77 v1(5640,952.42)
C\S\_F_P: J10_F.B10 U1_F.11 | length 744.4
  Top w6.3: U1_F.11@5139.17,1066.61 5132.03,1073.76 5100,1073.76 5080,1053.76 5080,991.07 5104,967.07 5366.65,967.07 v1(5370,970.42) ; v1(5640,970.42) 5643.35,967.07 5669.9,967.07 J10_F.B10@5674.09,971.26
  Bottom w6.3: v1(5370,970.42) 5373.35,967.07 5636.65,967.07 v1(5640,970.42)
C\S\_G: J6.65 U1_G.6 | length 3715.7
  Top w8: J6.65@2554.61,-665.98 2554.61,-500.39 2704.99,-350 2860,-350 4166.16,956.16 4166.16,1122.78 v2(4395,1351.61) ; v2(4828.52,1766.61) U1_G.6@4910.83,1766.61
  Bottom w8: v2(4395,1351.61) 4395,1620 4541.61,1766.61 v2(4828.52,1766.61)